# Altium PCB modFOC_ESC.PcbDoc (part 1 of 3)
Units mm, origin at the board's own origin, x right, y up, seen from the top; angles counter-clockwise.
Board outline 99.06 x 55.88 mm, 4 copper layers (Top Layer, Mid Layer 1, Mid Layer 2, Bottom Layer), stack 1.531 mm thick; 183 components, 125 nets, 799 pads, 484 vias.
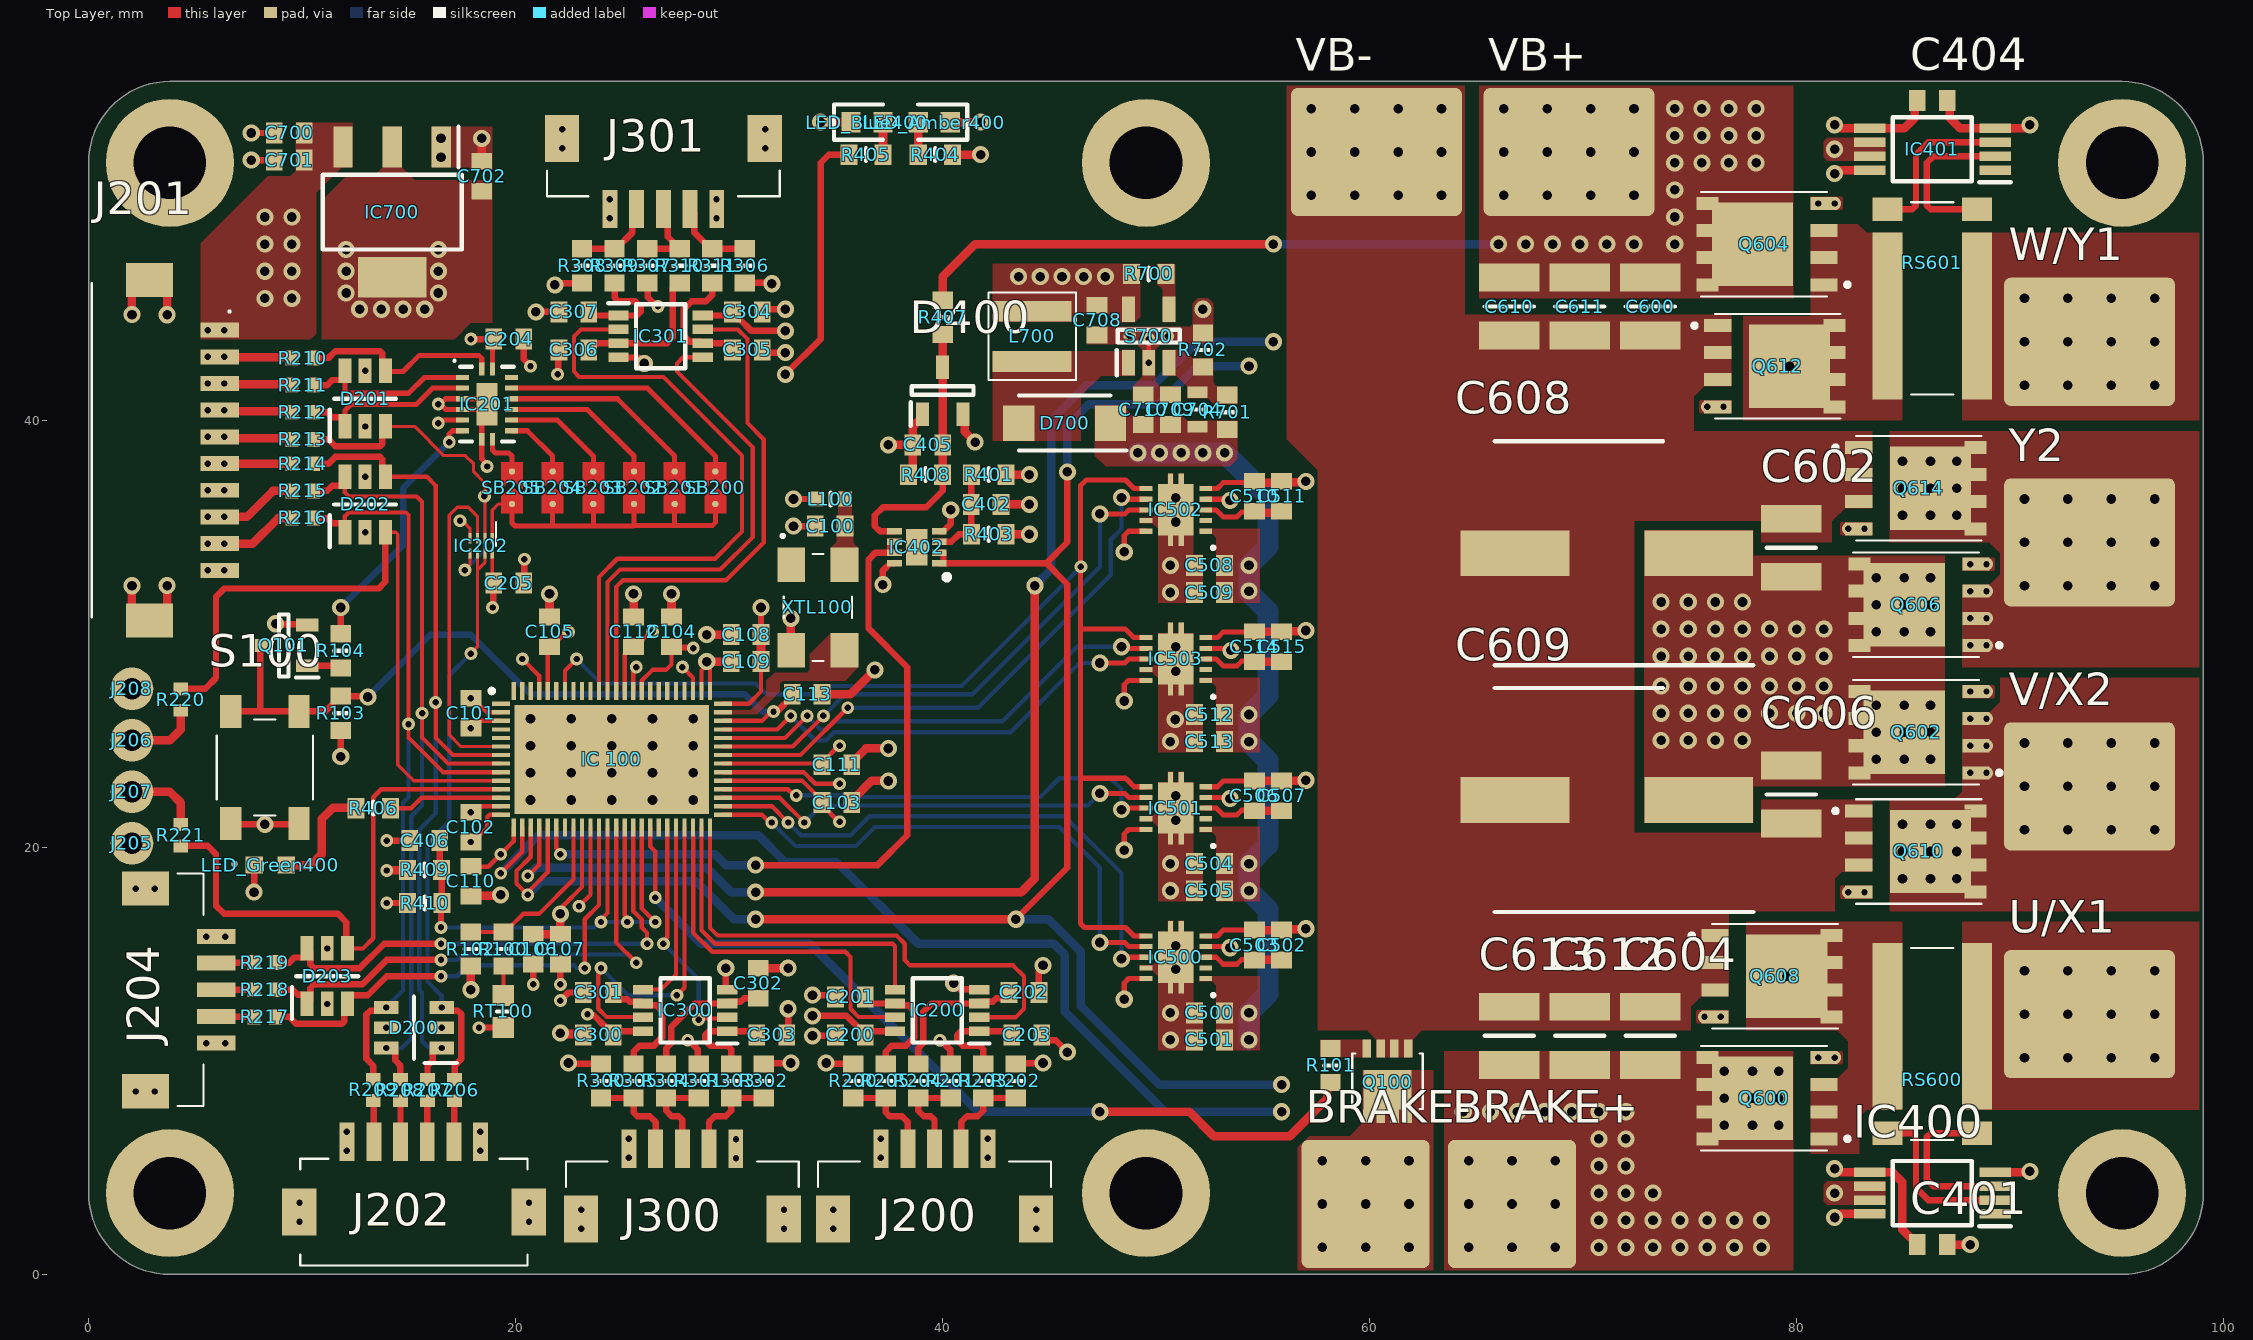
[diagram p0: Top Layer view]
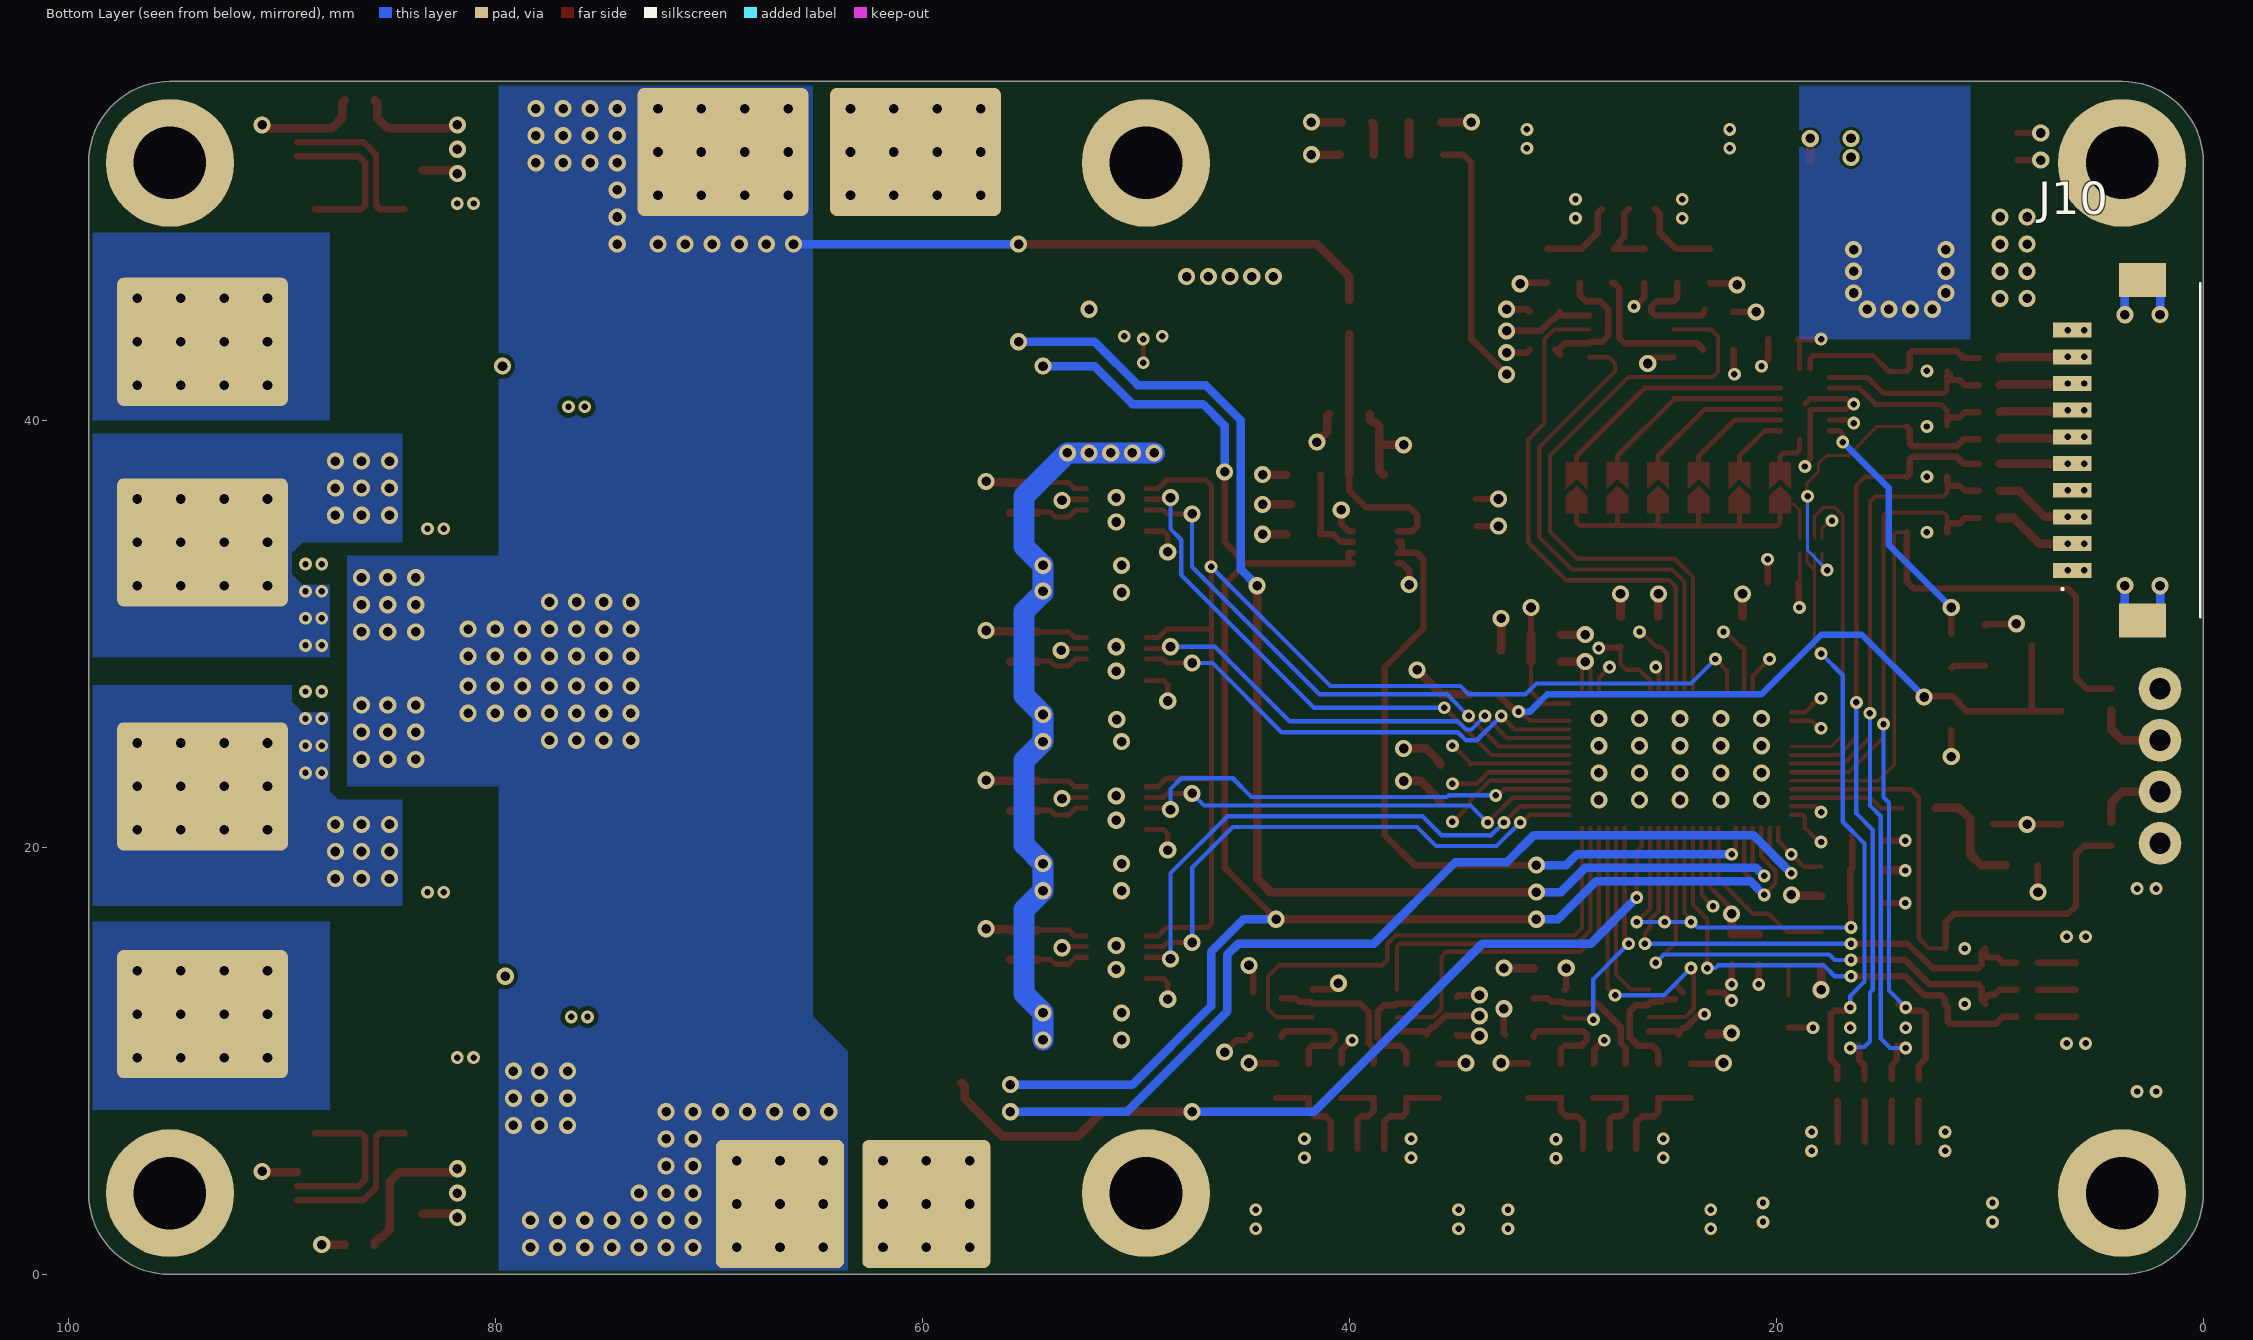
[diagram p1: Bottom Layer view, seen from below]
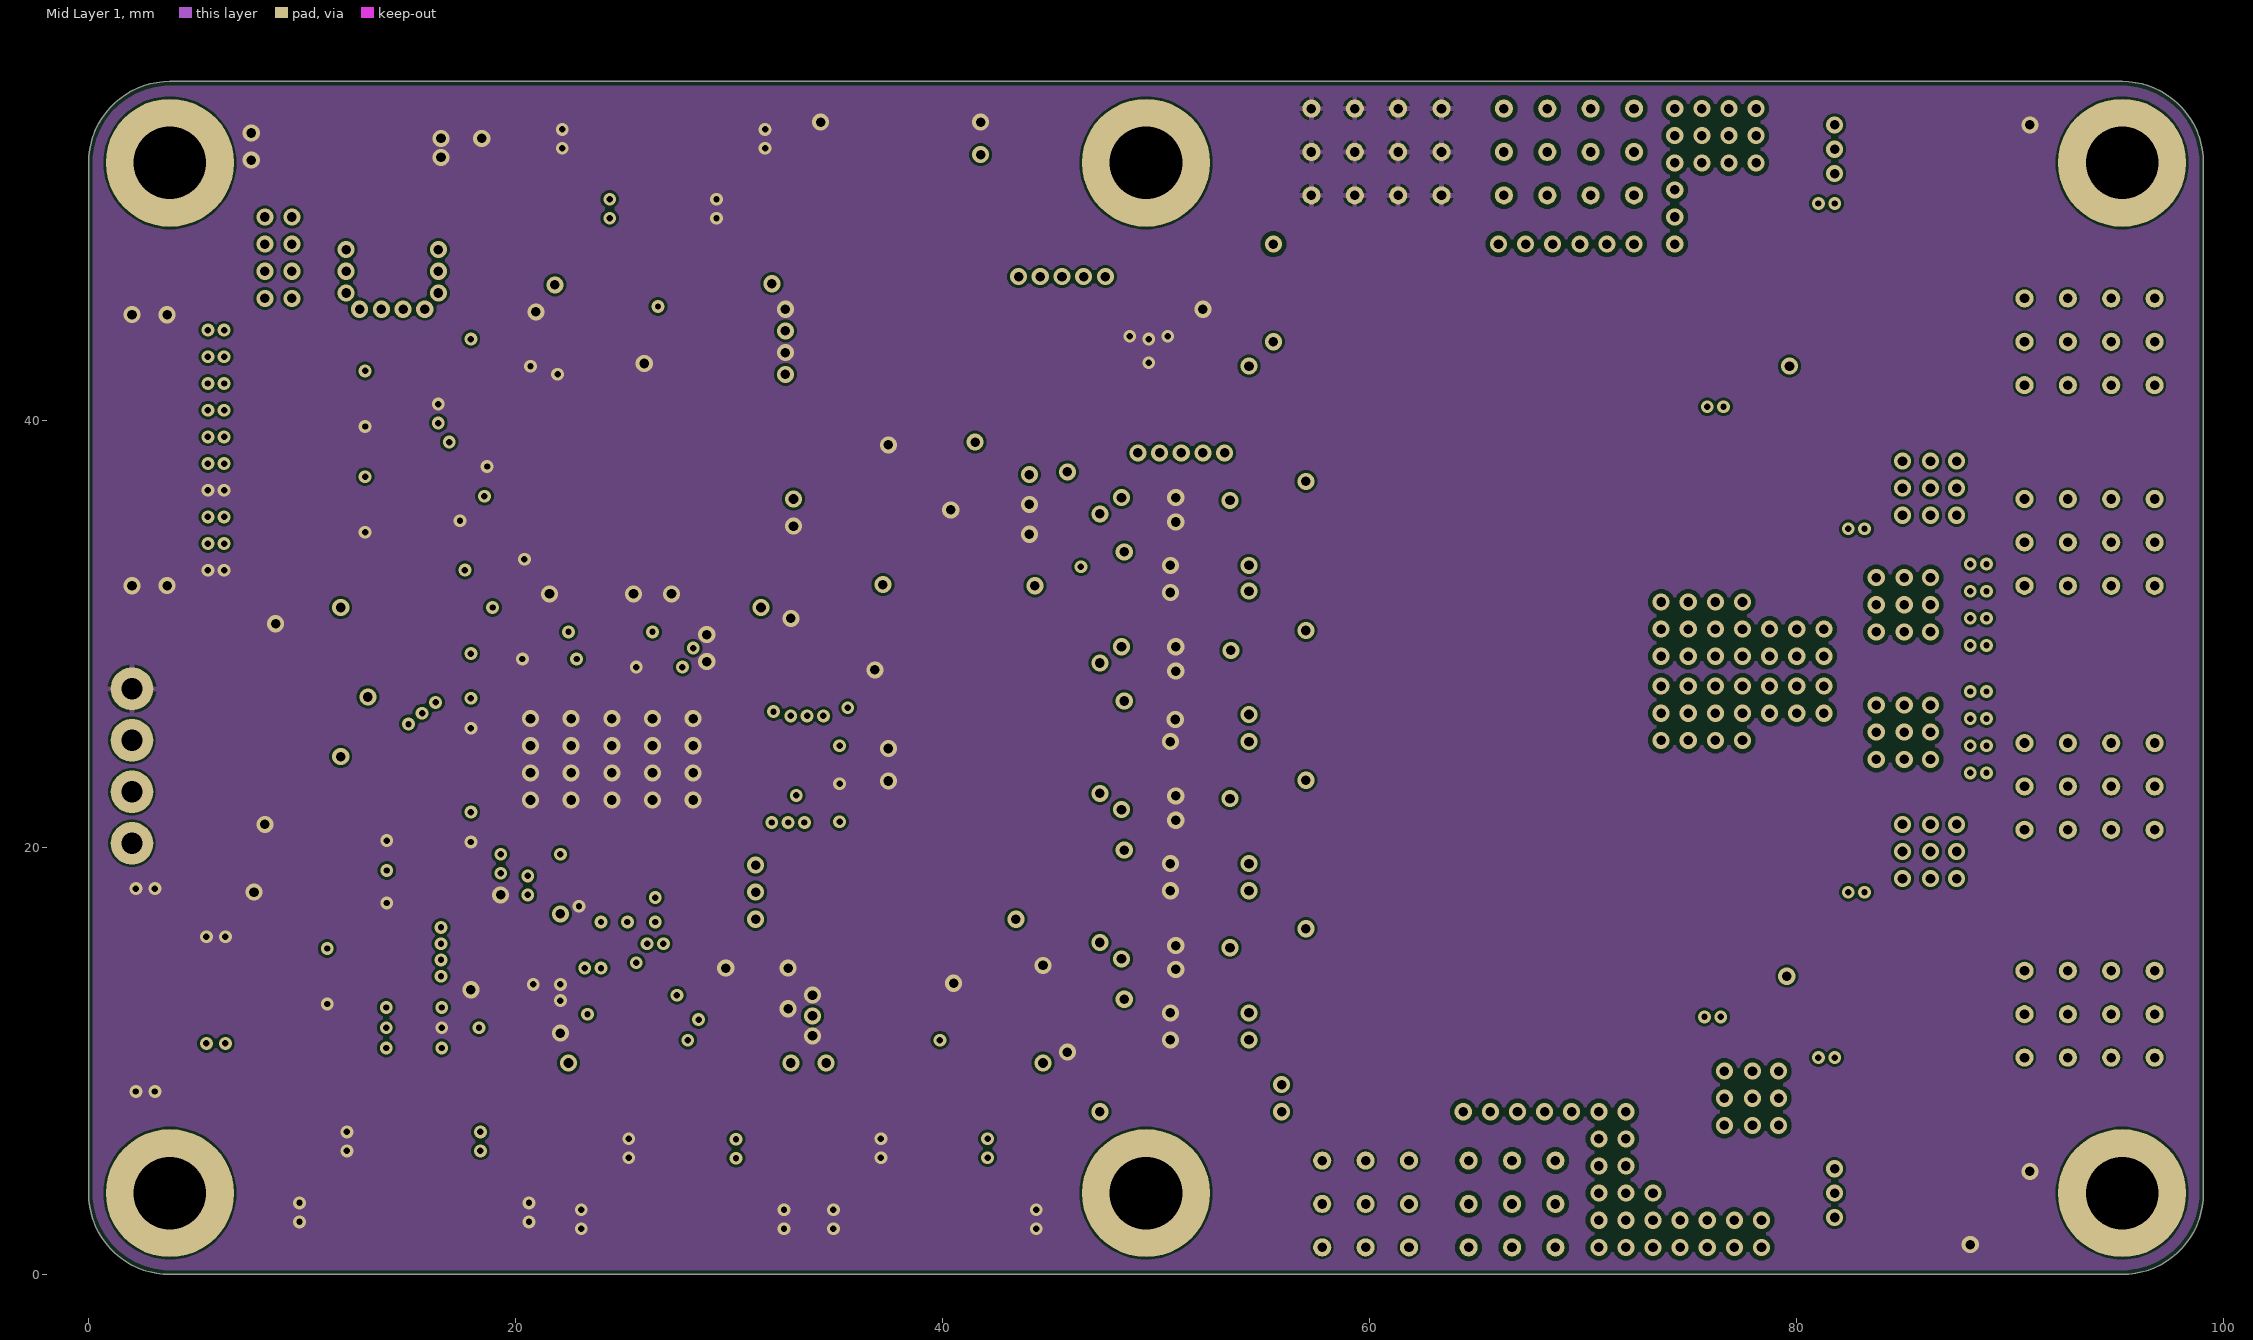
[diagram p2: Mid Layer 1]
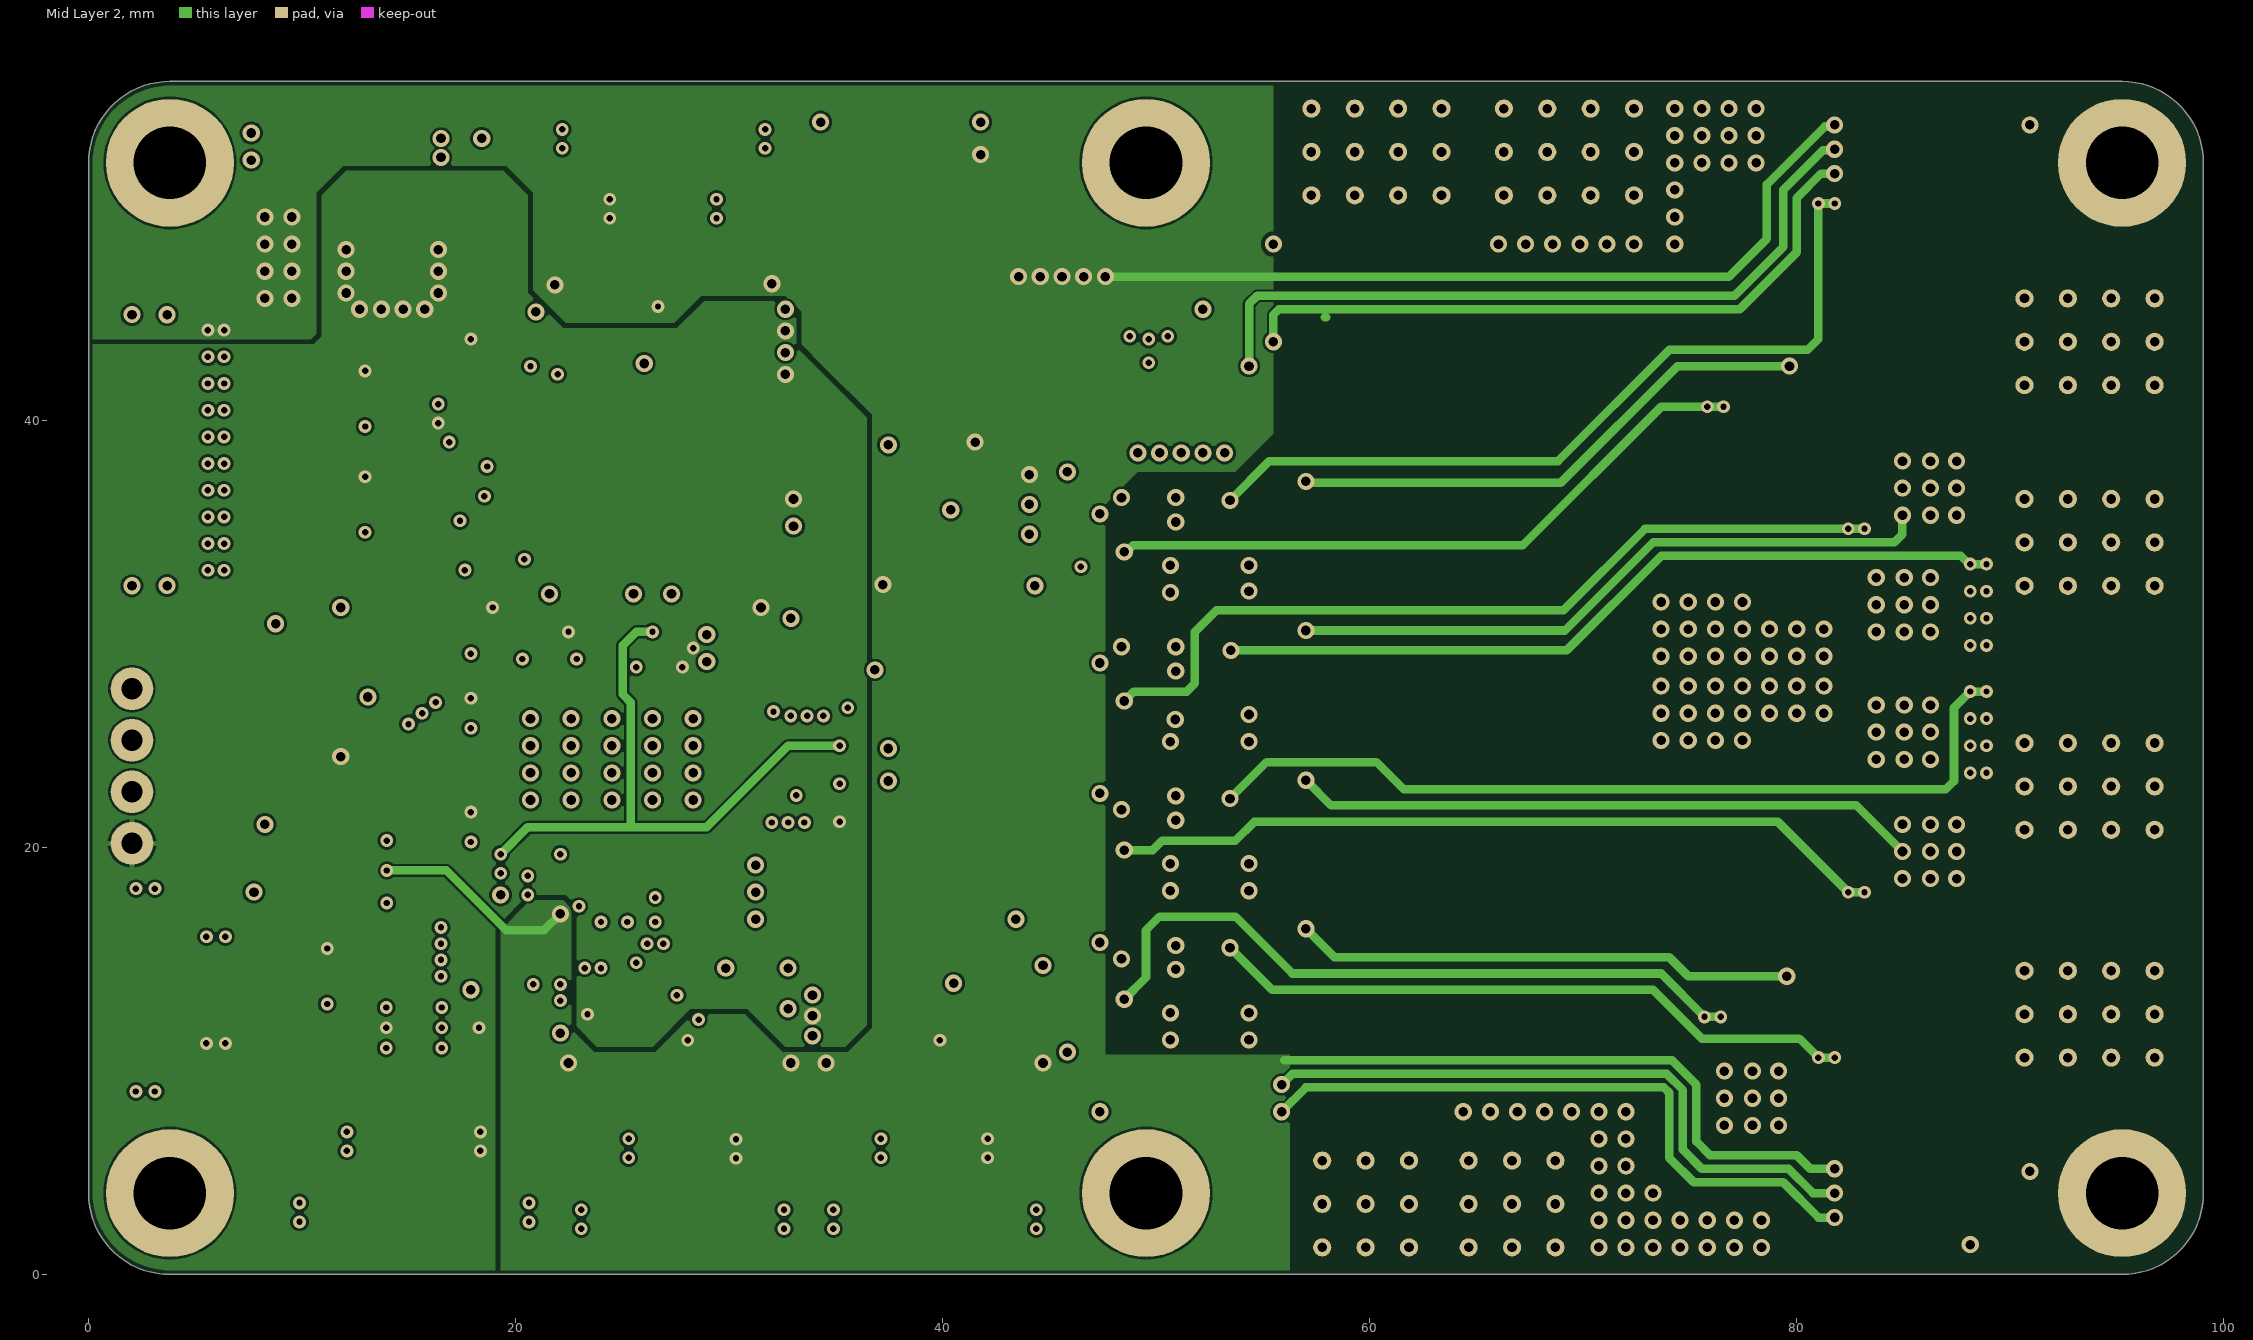
[diagram p3: Mid Layer 2]
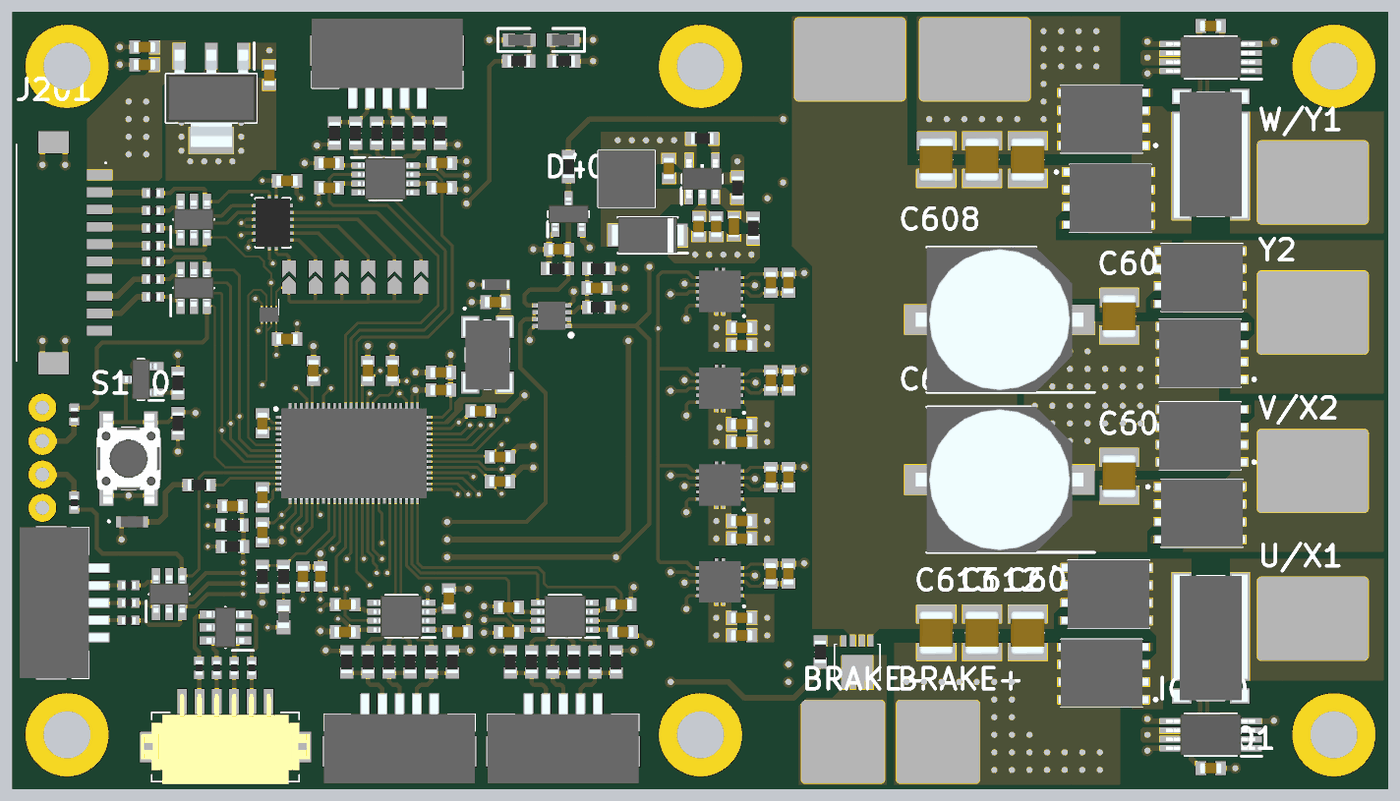
[diagram p5: 3D render of the assembled board from above, using the file's embedded part models]

## Layer stack, top to bottom
Top Solder: solder mask 0.0127, Solder Resist, Dk 3.8
Top Layer: signal copper 0.035
Dielectric 1: prepreg 0.1803, 7628, Dk 4.6
Mid Layer 1: signal copper 0.0175
Core: core 1.065, FR-4, Dk 4.5
Mid Layer 2: signal copper 0.0175
Dielectric 2: prepreg 0.1803, 7628, Dk 4.6
Bottom Layer: signal copper 0.035
Bottom Solder: solder mask 0.0127, Solder Resist, Dk 3.8

## Board outline
3.81,0 cw(c3.81,3.81) 0,3.81 0,52.07 cw(c3.81,52.07) 3.81,55.88 95.25,55.88 cw(c95.25,52.07) 99.06,52.07 99.06,3.81 cw(c95.25,3.81) 95.25,0

## Design rules (kind name [scope] priority, off if disabled: settings)
BoardOutlineClearance [All] p1: gap=0.2 ignorepadtopadclearanceinfootprint=FALSE
Clearance Clearance_VB [(InNet('VB+') oR InNet('SHA') oR InNet('SHB') oR InNet('SHC'))] p1: gap=0.2 ignorepadtopadclearanceinfootprint=FALSE except(0.102: Arc-Arc Arc-Track Arc-SMDPad Arc-THPad Arc-Text Track-Track Track-SMDPad Track-THPad Track-Text SMDPad-SMDPad SMDPad-THPad SMDPad-Text THPad-THPad THPad-Text Text-Text; 0.127: Arc-Via Track-Via SMDPad-Via THPad-Via Via-Via Via-Text; 0.25: Arc-Hole Track-Hole SMDPad-Hole THPad-Hole Via-Hole Text-Hole)
Clearance [All] p2: gap=0.102 ignorepadtopadclearanceinfootprint=FALSE except(0.127: Arc-Via Track-Via SMDPad-Via THPad-Via Via-Via Via-Fill Via-Poly Via-Region Via-Text; 0.25: Arc-Hole Track-Hole SMDPad-Hole THPad-Hole Via-Hole Fill-Hole Poly-Hole Region-Hole Text-Hole)
ComponentClearance [All] p1: gap=0.102 collisioncheckmode=3 verticalgap=0.102 showdistances=TRUE
DiffPairsRouting [All] p1: maxlimit=0.102 minlimit=0.102 mostfreqgap=0.102 toplayer_minwidth=0.102 toplayer_maxwidth=1816.048 toplayer_prefwidth=0.102 midlayer1_minwidth=0.102 midlayer1_maxwidth=1816.048 midlayer1_prefwidth=0.102 midlayer2_minwidth=0.102 midlayer2_maxwidth=1816.048 midlayer2_prefwidth=0.102 bottomlayer_minwidth=0.102 bottomlayer_maxwidth=1816.048 bottomlayer_prefwidth=0.102 maxuncoupledlength=12.7
Height [All] p1: minheight=0 maxheight=1816.048 prefheight=12.7
HoleSize [All] p1: absolutevalues=TRUE maxlimit=6.3 minlimit=0.2 maxpercent=80.000 minpercent=20.000
HoleToHoleClearance [All] p1: gap=0.25 allowstackedmicrovias=FALSE
MinimumAnnularRing [All] p1: minimumring=0.076
MinimumSolderMaskSliver [All] p1: minsoldermaskwidth=0.098
PlaneClearance [All] p1: clearance=0.102
PlaneConnect PlaneConnectPowerPads [InPadClass('PowerPads')] p1: planeconnectstyle=Direct reliefexpansion=0.508 reliefentries=4 reliefconductorwidth=0.254 reliefairgap=0.254
PlaneConnect [All] p2: pad.planeconnectstyle=Relief pad.reliefexpansion=0.3 pad.reliefentries=4 pad.reliefconductorwidth=0.102 pad.reliefairgap=0.102 via.planeconnectstyle=Direct via.reliefexpansion=0.3 via.reliefentries=4 via.reliefconductorwidth=0.127 via.reliefairgap=0.127
PolygonConnect PolygonConnectPowerPads [All vs (InPadClass('PowerPads'))] p1: connectstyle=Direct reliefconductorwidth=0.254 reliefentries=4 polygonreliefangle="90 Angle" airgapwidth=0.254
PolygonConnect [All] p2: thpad.connectstyle=Relief thpad.reliefconductorwidth=0.254 thpad.reliefentries=4 thpad.polygonreliefangle="90 Angle" thpad.airgapwidth=0.127 smdpad.connectstyle=Relief smdpad.reliefconductorwidth=0.254 smdpad.reliefentries=4 smdpad.polygonreliefangle="90 Angle" smdpad.airgapwidth=0.127 via.connectstyle=Direct via.reliefconductorwidth=0.127 via.reliefentries=4 via.polygonreliefangle="90 Angle" via.airgapwidth=0.127
RoutingVias [All] p1: holewidth=0.2 width=0.45 viastyle="Through Hole" minholewidth=0.2 minwidth=0.45 maxholewidth=6.3 maxwidth=6.55
SilkToSilkClearance [All] p1: silktosilkclearance=0
SilkToSolderMaskClearance [IsPad] p1: minsilkscreentomaskgap=0.102 clearancetoexposedcopper=TRUE
SolderMaskExpansion "SolderMaskExpansion Vias" [IsVia] p1: expansion=0.102 istentingtop=TRUE
SolderMaskExpansion [All] p2: expansion=0.05 istentingtop=FALSE
Width [All] p1: maxlimit=50 minlimit=0.102 preferedwidth=0.2 midlayer1_minwidth=0.127 midlayer2_minwidth=0.127 minimp=50.000000 maximp=50.000000 favimp=50.000000
20 further rules are at their usual default settings.

## Classes and differential pairs
component class Supply: C700 C701 C702 C704 C708 C709 C710 D700 IC700 L700 R700 R701 R702 S700
component class Sensing: C401 C402 C404 C405 C406 D400 IC400 IC401 IC402 LED_Amber400 LED_Blue400 LED_Green400 R401 R403 R404 R405 R406 R407 R408 R409 R410
component class Motion_Controller: BRAKE+ BRAKE- C100 C101 C102 C103 C104 C105 C106 C107 C108 C109 C110 C111 C112 C113 "IC 100" L100 Q100 Q101 R100 R101 R102 R103 R104 RT100 S100 XTL100
component class Inputs: C200 C201 C202 C203 C204 C205 D200 D201 D202 D203 IC200 IC201 IC202 J10 J200 J201 J202 J204 J205 J206 J207 J208 R200 R201 R202 R203 R204 R205 R206 R207 R208 R209 R210 R211 R212 R213 R214 R215 R216 R217 R218 R219 R220 R221 SB200 SB201 SB202 SB203 SB204 SB205
component class H_Bridges: C600 C602 C604 C606 C608 C609 C610 C611 C612 C613 Q600 Q602 Q604 Q606 Q608 Q610 Q612 Q614 RS600 RS601 U/X1 V/X2 VB+ VB- W/Y1 Y2
component class GateDrivers: C500 C501 C502 C503 C504 C505 C506 C507 C508 C509 C510 C511 C512 C513 C514 C515 IC500 IC501 IC502 IC503
component class ABNenc: C300 C301 C302 C303 C304 C305 C306 C307 IC300 IC301 J300 J301 R300 R301 R302 R303 R304 R305 R306 R307 R308 R309 R310 R311

## Components (designator, comment, footprint, x,y, rotation, side; value= is the part's Value field where it differs from the comment)
BRAKE+ "PW_PAD_SMOL" PW_PAD_SMOL 66.675,3.302 r90 top
BRAKE- "PW_PAD_SMOL" PW_PAD_SMOL 59.817,3.302 r180 top
C100 "100nF/16V" CAPC1608X97N 34.733,35.052 r0 top
C101 "100nF/16V" CAPC1608X97N 17.907,26.289 r90 top
C102 "100nF/16V" CAPC1608X97N 17.907,20.955 r90 top
C103 "100nF/16V" CAPC1608X97N 35.052,22.098 r180 top
C104 "100nF/16V" CAPC1608X97N 27.305,30.099 r270 top
C105 "100nF/16V" CAPC1608X97N 21.59,30.099 r270 top
C106 "4u7/16V" CAPC1608X97N 20.828,15.24 r90 top
C107 "100nF/16V" CAPC1608X97N 22.098,15.24 r270 top
C108 "4u7/16V" CAPC1608X97N 30.796,29.972 r0 top
C109 "470nF/16V" CAPC1608X97N 30.796,28.702 r180 top
C110 "100nF/16V" CAPC1608X97N 17.907,18.415 r270 top
C111 "100nF/16V" CAPC1608X97N 35.052,23.876 r0 top
C112 "100nF/16V" CAPC1608X97N 25.527,30.099 r90 top
C113 "100nF/16V" CAPC1608X97N 33.655,27.178 r180 top
C200 "100nF/16V" CAPC1608X97N 35.687,11.226 r0 top
C201 "1nF/16V" CAPC1608X97N 35.687,13.004 r180 top
C202 "1nF/16V" CAPC1608X97N 43.815,13.208 r0 top
C203 "1nF/16V" CAPC1608X97N 43.942,11.226 r0 top
C204 "100nF/16V" CAPC1608X97N 19.685,43.815 r0 top
C205 "100nF/16V" CAPC1608X97N 19.685,32.385 r0 top
C300 "100nF/16V" CAPC1608X97N 23.876,11.226 r0 top
C301 "100pF/10V" CAPC1608X97N 23.876,13.208 r180 top
C302 "100pF/10V" CAPC1608X97N 31.369,13.639 r90 top
C303 "100pF/10V" CAPC1608X97N 32.004,11.226 r0 top
C304 "100nF/16V" CAPC1608X97N 30.861,45.085 r180 top
C305 "100pF/10V" CAPC1608X97N 30.861,43.307 r0 top
C306 "100pF/10V" CAPC1608X97N 22.733,43.307 r180 top
C307 "100pF/10V" CAPC1608X97N 22.733,45.085 r180 top
C401 "100nF/16V" CAPC1608X97N 86.36,1.397 r180 top
C402 "100nF/16V" CAPC1608X97N 42.037,36.068 r180 top
C404 "100nF/16V" CAPC1608X97N 86.36,54.991 r180 top
C405 "100nF/16V" CAPC1608X97N 39.305,38.862 r0 top
C406 "100nF/16V" CAPC1608X97N 15.748,20.32 r0 top
C500 "1nF/16V" CAPC1608X97N 52.504,12.257 r0 top
C501 "4u7/16V" CAPC1608X97N 52.504,10.987 r0 top
C502 "1nF/16V" CAPC1608X97N 55.877,15.432 r270 top
C503 "470nF/16V" CAPC1608X97N 54.607,15.432 r270 top
C504 "1nF/16V" CAPC1608X97N 52.504,19.242 r0 top
C505 "4u7/16V" CAPC1608X97N 52.504,17.972 r0 top
C506 "1nF/16V" CAPC1608X97N 54.607,22.417 r270 top
C507 "470nF/16V" CAPC1608X97N 55.877,22.417 r270 top
C508 "1nF/16V" CAPC1608X97N 52.504,33.212 r0 top
C509 "4u7/16V" CAPC1608X97N 52.504,31.942 r0 top
C510 "1nF/16V" CAPC1608X97N 54.61,36.449 r270 top
C511 "470nF/16V" CAPC1608X97N 55.88,36.449 r270 top
C512 "1nF/16V" CAPC1608X97N 52.504,26.227 r0 top
C513 "4u7/16V" CAPC1608X97N 52.504,24.957 r0 top
C514 "1nF/16V" CAPC1608X97N 54.607,29.402 r270 top
C515 "470nF/16V" CAPC1608X97N 55.877,29.402 r270 top
C600 "2u2/100V" CAPC3225X280N 73.152,45.339 r90 top
C602 "2u2/100V" CAPC3225X280N 79.756,34.036 r270 top
C604 "2u2/100V" CAPC3225X280N 73.152,11.176 r270 top
C606 "2u2/100V" CAPC3225X280N 79.756,22.479 r90 top
C608 "47uF 80V" CAPAE1050X1050N 71.12,33.782 r180 top
C609 "47uF 80V" CAPAE1050X1050N 71.12,22.225 r180 top
C610 "2u2/100V" CAPC3225X280N 66.548,45.339 r90 top
C611 "2u2/100V" CAPC3225X280N 69.85,45.339 r90 top
C612 "2u2/100V" CAPC3225X280N 69.85,11.176 r270 top
C613 "2u2/100V" CAPC3225X280N 66.548,11.176 r270 top
C700 "4u7/16V" CAPC1608X97N 9.398,53.467 r180 top
C701 "4u7/16V" CAPC1608X97N 9.398,52.197 r180 top
C702 "4u7/16V" CAPC1608X97N 18.415,51.435 r90 top
C704 "200p/50V/NP0" CAPC1608X90N 51.943,40.513 r90 top
C708 "4u7/16V" CAPC1608X97N 47.244,44.704 r270 top
C709 "4u7/16V" CAPC1608X97N 50.673,40.513 r90 top
C710 "4u7/16V" CAPC1608X97N 49.403,40.513 r90 top
D200 "ESDSUPPRESSOR" SOT23-6 15.24,11.557 r180 top
D201 "ESDSUPPRESSOR" SOT23-6 12.954,41.021 r90 top
D202 "ESDSUPPRESSOR" SOT23-6 12.954,36.068 r90 top
D203 "ESDSUPPRESSOR" SOT23-6 11.176,13.97 r90 top
D400 "30V/200mA" SOT95P240X110-3N 40.005,41.402 r90 top
D700 "1A/30V" SODFL5226X110N 45.72,39.878 r180 top
IC200 "S-Trigger" SOP65P400X110-8N 39.751,12.369 r180 top
IC201 "SN74HCS238BQB-Q1" SN74HCS238BQB-Q1 18.665,40.768 r0 top
IC202 "dual NAND" 74AUP1G74GF115 18.388,34.136 r180 top
IC300 "S-Trigger" SOP65P400X110-8N 27.94,12.369 r180 top
IC301 "S-Trigger" SOP65P400X110-8N 26.797,43.942 r0 top
IC400 "INA240A2PWR" SOP65P640X120-8N 86.36,3.81 r180 top
IC401 "INA240A2PWR" SOP65P640X120-8N 86.36,52.705 r180 top
IC402 "LM358QT" SON50P200X200X60-9N-D 38.797,34.063 r180 top
IC500 "UCC27282QDRCTQ1" UCC27282DRCR 50.927,14.859 r180 top
IC501 "UCC27282QDRCTQ1" UCC27282DRCR 50.927,21.844 r180 top
IC502 "UCC27282QDRCTQ1" UCC27282DRCR 50.927,35.814 r180 top
IC503 "UCC27282QDRCTQ1" UCC27282DRCR 50.927,28.829 r180 top
IC700 "1A 3,3V LDO" SOT230P700X180-4N 14.224,49.761 r270 top
"IC 100" "Motion Ctrl" QFN40P1050X650X90-77N 24.511,24.13 r0 top
J10 "DF13A-10P-1.25H_21_" DF13A10P125H21 3.15,38.608 r270 bottom
J200 "5_PIN" DF13A5P125H21 39.624,3.098 r180 top
J201 "DF13A-10P-1.25H_21_" DF13A10P125H21 3.15,38.608 r90 top
J202 "6_PIN" DF13A6P125H21 15.24,2.921 r180 top
J204 "5_PIN" DF13A5P125H21 3.175,13.335 r90 top
J205 "3V3" PIN 2.032,20.193 r90 top
J206 "UART_RX" PIN 2.032,25.019 r90 top
J207 "UART_TX" PIN 2.032,22.606 r90 top
J208 "GND" PIN 2.032,27.432 r90 top
J300 "5_PIN" DF13A5P125H21 27.813,3.098 r180 top
J301 "5_PIN" DF13A5P125H21 26.924,52.705 r0 top
L100 "30R@100MHz/5A" BLM18KG101TH1D 34.758,36.322 r0 top
L700 "10uH/4,6A" 74438357100 44.196,43.942 r270 top
LED_Amber400 "AMBER/2V/20mA" LEDC1608X55N 39.612,53.975 r180 top
LED_Blue400 "BLUE/2,85V/5mA" LEDC1608X40N 36.461,53.975 r0 top
LED_Green400 "GREEN/2,4V/20mA" LGQ396PS35 8.509,19.177 r0 top
Q100 "BUK9M35-80EX" BUK7M1260E 60.842,9.479 r180 top
Q101 "BC847A,235" SOT95P230X110-3N 9.144,29.464 r180 top
Q600 "80V/100A" SI7141DPT1GE3 78.486,8.255 r180 top
Q602 "80V/100A" SI7141DPT1GE3 85.598,25.4 r180 top
Q604 "80V/100A" SI7141DPT1GE3 78.486,48.26 r180 top
Q606 "80V/100A" SI7141DPT1GE3 85.598,31.369 r180 top
Q608 "80V/100A" SI7141DPT1GE3 78.994,13.97 r0 top
Q610 "80V/100A" SI7141DPT1GE3 85.725,19.812 r0 top
Q612 "80V/100A" SI7141DPT1GE3 79.121,42.545 r0 top
Q614 "80V/100A" SI7141DPT1GE3 85.725,36.83 r0 top
R100 "4k7" RESC1608X55N 19.431,15.24 r270 top
R101 "10R" RESC1608X55N 58.175,9.788 r90 top
R102 "4k7" RESC1608X55N 17.907,15.24 r90 top
R103 "4k7" RESC1608X55N 11.811,26.289 r270 top
R104 "1k" RESC1608X55N 11.811,29.21 r90 top
R200 "4k7" RESC1608X55N 35.814,9.067 r90 top
R201 "4k7" RESC1608X55N 40.386,9.067 r90 top
R202 "4k7" RESC1608X55N 43.434,9.067 r90 top
R203 "4k7" RESC1608X55N 41.91,9.067 r270 top
R204 "4k7" RESC1608X55N 38.862,9.067 r270 top
R205 "4k7" RESC1608X55N 37.338,9.067 r270 top
R206 "100R" RESC1005X40N 17.145,8.636 r90 top
R207 "100R" RESC1005X40N 15.875,8.636 r90 top
R208 "100R" RESC1005X40N 14.605,8.636 r90 top
R209 "100R" RESC1005X40N 13.335,8.644 r90 top
R210 "100R" RESC1005X40N 10.033,42.926 r180 top
R211 "100R" RESC1005X40N 10.033,41.656 r180 top
R212 "100R" RESC1005X40N 10.033,40.386 r180 top
R213 "100R" RESC1005X40N 10.033,39.116 r180 top
R214 "100R" RESC1005X40N 10.033,37.973 r180 top
R215 "100R" RESC1005X40N 10.033,36.703 r180 top
R216 "100R" RESC1005X40N 10.033,35.433 r180 top
R217 "100R" RESC1005X40N 8.255,12.065 r0 top
R218 "100R" RESC1005X40N 8.255,13.335 r0 top
R219 "100R" RESC1005X40N 8.255,14.605 r0 top
R220 "100R" RESC1005X40N 4.318,26.924 r90 top
R221 "100R" RESC1005X40N 4.318,20.574 r270 top
R300 "4k7" RESC1608X55N 24.003,9.067 r90 top
R301 "4k7" RESC1608X55N 28.575,9.067 r90 top
R302 "4k7" RESC1608X55N 31.623,9.067 r90 top
R303 "1k" RESC1608X55N 30.099,9.067 r270 top
R304 "1k" RESC1608X55N 27.051,9.067 r270 top
R305 "1k" RESC1608X55N 25.527,9.067 r270 top
R306 "4k7" RESC1608X55N 30.734,47.244 r270 top
R307 "4k7" RESC1608X55N 26.162,47.244 r270 top
R308 "4k7" RESC1608X55N 23.114,47.244 r270 top
R309 "1k" RESC1608X55N 24.638,47.244 r90 top
R310 "1k" RESC1608X55N 27.686,47.244 r90 top
R311 "1k" RESC1608X55N 29.21,47.244 r90 top
R401 "4k7" RESC1608X55N 42.164,37.465 r0 top
R403 "4k7" RESC1608X55N 42.164,34.671 r180 top
R404 "1k5" RESC1608X55N 39.662,52.451 r180 top
R405 "470R" RESC1608X55N 36.411,52.451 r0 top
R406 "470R" RESC1608X55N 13.335,21.844 r180 top
R407 "47k" RESC1608X55N 40.005,44.831 r270 top
R408 "2k7" RESC1608X55N 39.205,37.465 r180 top
R409 "4k7" RESC1608X55N 15.739,18.947 r180 top
R410 "4k7" RESC1608X55N 15.748,17.399 r0 top
R700 "1M" RESC1608X55N 49.657,46.863 r180 top
R701 "133k" RESC1608X55N 53.34,40.386 r90 top
R702 "13k3" RESC1608X55N 52.197,43.307 r90 top
RS600 "5mR/4W" FC4L90R025FER 86.36,10.795 r180 top
RS601 "5mR/4W" FC4L90R025FER 86.36,45.72 r0 top
RT100 "10k NTC" THRMC1608X95N 19.431,12.319 r90 top
S100 "NO-SW" PTS647SM50SMTR2LFS 8.255,23.749 r90 top
S700 "LMR62014XMF_NOPB" SOT95P280X145-5N 49.657,43.954 r90 top
SB200 "Solder Bridge" SOLDER-BRIDGE_R0603-0R 29.358,36.851 r90 top
SB201 "Solder Bridge" SOLDER-BRIDGE_R0603-0R 27.453,36.851 r90 top
SB202 "Solder Bridge" SOLDER-BRIDGE_R0603-0R 25.548,36.851 r90 top
SB203 "Solder Bridge" SOLDER-BRIDGE_R0603-0R 23.643,36.851 r90 top
SB204 "Solder Bridge" SOLDER-BRIDGE_R0603-0R 21.738,36.851 r90 top
SB205 "Solder Bridge" SOLDER-BRIDGE_R0603-0R 19.833,36.851 r90 top
U/X1 "PowerPad" POWER_PAD 93.726,12.192 r0 top
V/X2 "PowerPad" POWER_PAD 93.726,22.86 r0 top
VB+ "PowerPad" POWER_PAD 69.342,52.578 r0 top
VB- "PowerPad" POWER_PAD 60.325,52.578 r0 top
W/Y1 "PowerPad" POWER_PAD 93.726,43.688 r0 top
XTL100 "25MHz" FOX924B25 34.163,31.242 r270 top
Y2 "PowerPad" POWER_PAD 93.726,34.29 r0 top

## Footprints (in the part's own frame and the unit in brackets; to place one, negate y for a bottom-side part, rotate by r counter-clockwise, add the part's x,y. Pads: shape width x height; smd on the part's side, far side on the other; paste and mask are expansions set on the pad)
74AUP1G74GF115 [mm]
  rect 0.15x0.5 smd: 1(-0.525,-0.35) 2(-0.175,-0.35) 3(0.175,-0.35) 4(0.525,-0.35) 5(0.525,0.35) 6(0.175,0.35) 7(-0.175,0.35) 8(-0.525,0.35)
  silkscreen extent -0.7,-1.1 -0.7,0, body extent -0.7,-0.5 0.7,0.5, height 0.6
74438357100 [mm]
  rect 0.97x3.7 smd: 1(-1.18,0) 2(1.18,0)
  silkscreen extent -2.05,-2.05 2.05,2.05, body extent -2.05,-2.05 2.05,2.05, height 4.1
BLM18KG101TH1D [mm]
  rect 0.65x0.7 smd: 1(-0.675,0) 2(0.675,0)
  silkscreen extent 0,-0.3 0,0.3, body extent -0.93,-0.4 0.93,0.4, height 0.85
BUK7M1260E [mm]
  rect 0.4x0.83 smd: 1(-0.975,-1.106) 2(-0.325,-1.106) 3(0.325,-1.106) 4(0.975,-1.106)
  rect 2.25x1.85 smd: 5(0,0.834)
  rect 0.4x0.62 smd: 6(0.95,2.069) 7(0.312,2.069) 8(-0.345,2.069) 9(-0.95,2.069)
  silkscreen extent -1.65,-0.87 1.65,1.73
CAPAE1050X1050N [mm]
  rect 5.1x2.15 smd: 1(-4.3,0) 2(4.3,0)
  silkscreen extent -6.85,-5.25 5.25,5.25, body extent -6.05,-5.25 6.05,5.25, height 10.5
CAPC1608X90N [mm]
  rect 0.54x0.94 smd: 1(-0.8,0) 2(0.8,0)
  silkscreen extent 0,-0.3 0,0.3, body extent -0.8,-0.4 0.8,0.4, height 0.9
CAPC1608X97N [mm]
  rect 0.78x0.98 smd: 1(-0.7,0) 2(0.7,0)
  body extent -0.8,-0.4 0.8,0.4, height 0.97
CAPC3225X280N [mm]
  rect 1.3x2.82 smd: 1(-1.36,0) 2(1.36,0)
  silkscreen extent 0,-1.15 0,1.15, body extent -1.6,-1.25 1.6,1.25, height 2.8
DF13A5P125H21 [mm]
  rect 0.7x1.8 smd: 1(2.5,-2.8) 2(1.25,-2.8) 3(0,-2.8) 4(-1.25,-2.8) 5(-2.5,-2.8)
  rect 1.6x2.2 smd: MP1(-4.75,0.5) MP2(4.75,0.5)
  silkscreen extent -5.45,-2.2 5.45,-1, body extent -5.45,-3.63 5.45,2.8, height 3.85
DF13A6P125H21 [mm]
  rect 0.7x1.8 smd: 1(-3.125,-3.3) 2(-1.875,-3.3) 3(-0.625,-3.3) 4(0.625,-3.3) 5(1.875,-3.3) 6(3.125,-3.3)
  rect 1.6x2.2 smd: MP1(-5.375,0) MP2(5.375,0)
  silkscreen extent -5.33,-2.5 5.33,2.5, body extent -6.07,-3.83 6.07,2.67, height 3.68
DF13A10P125H21 [mm]
  rect 0.7x1.8 smd: 1(5.625,-3) 2(4.375,-3) 3(3.125,-3) 4(1.875,-3) 5(0.625,-3) 6(-0.625,-3) 7(-1.875,-3) 8(-3.125,-3) 9(-4.375,-3) 10(-5.625,-3)
  rect 1.6x2.2 smd: MP1(-7.975,0.3) MP2(7.975,0.3)
  silkscreen extent -7.83,-3.5 7.83,3
FC4L90R025FER [mm]
  rect 1.4x1.1 smd: 1(-2.1,4.175) 4(2.1,4.175)
  rect 1.4x7.8 smd: 2(-2.1,-0.825) 3(2.1,-0.825)
  silkscreen extent -1,-4.5 1,4.5, body extent -2.69,-4.58 2.69,4.61, height 0.9
FOX924B25 [mm]
  rect 1.6x1.3 smd: 1(-2,-1.25) 2(2,-1.25) 3(2,1.25) 4(-2,1.25)
  silkscreen extent -3.4,-1.7 2.5,1.6, body extent -2.67,-1.77 2.67,1.77, height 1.6
LEDC1608X40N [mm]
  rect 0.9x0.95 smd: 1(-0.75,0) 2(0.75,0)
  silkscreen extent -1.55,-0.82 0.75,0.82, body extent -0.8,-0.4 0.8,0.4, height 0.5
LEDC1608X55N [mm]
  rect 0.9x0.95 smd: 1(-0.75,0) 2(0.75,0)
  silkscreen extent -1.55,-0.82 0.75,0.82, body extent -0.8,-0.4 0.8,0.4, height 0.5
LGQ396PS35 [mm]
  rect 0.8x0.8 smd: 1(-0.75,0) 2(0.75,0)
  silkscreen extent -1.72,0 -1.62,0.1, body extent -0.8,-0.4 0.8,0.4, height 0.5
PIN [mm]
  round 2 hole 1: 1(0,0)
POWER_PAD [mm]
  round 0.85 hole 0.45: 1(-3.048,-2.032) 1(-3.048,0) 1(-3.048,2.032) 1(-1.016,-2.032) 1(-1.016,0) 1(-1.016,2.032) 1(1.016,-2.032) 1(1.016,0) 1(1.016,2.032) 1(3.048,-2.032) 1(3.048,0) 1(3.048,2.032)
  rrect10% 8x6 smd far side: 1(0,0)
  rrect10% 8x6 smd: 1(0,0)
PTS647SM50SMTR2LFS [mm]
  rect 1.55x1 smd: 1(-2.625,1.6) 2(-2.625,-1.6) 3(2.625,-1.6) 4(2.625,1.6)
  silkscreen extent -2.25,-2.25 2.25,2.25, body extent -3.25,-2.25 3.25,2.25, height 5
PW_PAD_SMOL [mm]
  round 0.85 hole 0.45: 1(-2.032,-2.032) 1(-2.032,0) 1(-2.032,2.032) 1(0,2.032) 1(0,0) 1(0,-2.032) 1(2.032,-2.032) 1(2.032,0) 1(2.032,2.032)
  rrect10% 6x6 smd far side: 1(0,0)
  rrect10% 6x6 smd: 1(0,0)
QFN40P1050X650X90-77N [mm]
  rect 0.85x0.2 smd: 1(-5.2,2.6) 2(-5.2,2.2) 3(-5.2,1.8) 4(-5.2,1.4) 5(-5.2,1) 6(-5.2,0.6) 7(-5.2,0.2) 8(-5.2,-0.2) 9(-5.2,-0.6) 10(-5.2,-1) 11(-5.2,-1.4) 12(-5.2,-1.8) 13(-5.2,-2.2) 14(-5.2,-2.6) 39(5.2,-2.6) 40(5.2,-2.2) 41(5.2,-1.8) 42(5.2,-1.4) 43(5.2,-1) 44(5.2,-0.6) 45(5.2,-0.2) 46(5.2,0.2) 47(5.2,0.6) 48(5.2,1) 49(5.2,1.4) 50(5.2,1.8) 51(5.2,2.2) 52(5.2,2.6)
  rect 0.2x0.85 smd: 15(-4.6,-3.2) 16(-4.2,-3.2) 17(-3.8,-3.2) 18(-3.4,-3.2) 19(-3,-3.2) 20(-2.6,-3.2) 21(-2.2,-3.2) 22(-1.8,-3.2) 23(-1.4,-3.2) 24(-1,-3.2) 25(-0.6,-3.2) 26(-0.2,-3.2) 27(0.2,-3.2) 28(0.6,-3.2) 29(1,-3.2) 30(1.4,-3.2) 31(1.8,-3.2) 32(2.2,-3.2) 33(2.6,-3.2) 34(3,-3.2) 35(3.4,-3.2) 36(3.8,-3.2) 37(4.2,-3.2) 38(4.6,-3.2) 53(4.6,3.2) 54(4.2,3.2) 55(3.8,3.2) 56(3.4,3.2) 57(3,3.2) 58(2.6,3.2) 59(2.2,3.2) 60(1.8,3.2) 61(1.4,3.2) 62(1,3.2) 63(0.6,3.2) 64(0.2,3.2) 65(-0.2,3.2) 66(-0.6,3.2) 67(-1,3.2) 68(-1.4,3.2) 69(-1.8,3.2) 70(-2.2,3.2) 71(-2.6,3.2) 72(-3,3.2) 73(-3.4,3.2) 74(-3.8,3.2) 75(-4.2,3.2) 76(-4.6,3.2)
  rect 9.1x5.1 smd: 77(0,0)
  silkscreen extent -5.72,3.1 -5.53,3.3, body extent -5.3,-3.3 5.3,3.3, height 0.9
RESC1005X40N [mm]
  rect 0.6x0.7 smd: 1(-0.5,0) 2(0.5,0)
  body extent -0.5,-0.25 0.5,0.25, height 0.4
RESC1608X55N [mm]
  rect 0.8x0.95 smd: 1(-0.8,0) 2(0.8,0)
  silkscreen extent 0,-0.3 0,0.3, body extent -0.8,-0.4 0.8,0.4, height 0.55
SI7141DPT1GE3 [mm]
  rect 1.27x0.61 smd: 1(-2.81,1.905) 2(-2.81,0.635) 3(-2.81,-0.635) 4(-2.81,-1.905)
  rect 0.71x0.61 smd: 5(2.81,-1.905) 6(2.81,-0.635) 7(2.81,0.635) 8(2.81,1.905)
  rect 3.81x3.91 smd: 9(0.55,0)
  rect 0.32x0.255 smd: 10(2.3,2.083) 11(2.3,-2.083)
  silkscreen extent -4,-2.45 2.95,2.45, body extent -3.38,-2.45 3.1,2.45, height 1.22
SN74HCS238BQB-Q1 [mm]
  rect 0.24x0.6 smd: 1(-0.25,1.65) 8(-0.25,-1.65) 9(0.25,-1.65) 16(0.25,1.65)
  rect 0.6x0.24 smd: 2(-1.15,1.25) 3(-1.15,0.75) 4(-1.15,0.25) 5(-1.15,-0.25) 6(-1.15,-0.75) 7(-1.15,-1.25) 10(1.15,-1.25) 11(1.15,-0.75) 12(1.15,-0.25) 13(1.15,0.25) 14(1.15,0.75) 15(1.15,1.25)
  rect 1x2 smd: 17(0,0)
  silkscreen extent -1.57,-1.75 1.25,2.08, body extent -1.25,-1.75 1.25,1.75, height 0.8
SODFL5226X110N [mm]
  rect 1.46x1.67 smd: 1(-2.15,0) 2(2.15,0)
  silkscreen extent -2.88,-1.29 2.14,1.29, body extent -2.59,-1.29 2.59,1.29, height 1.1
SOLDER-BRIDGE_R0603-0R [mm]
  round 0.3 smd: 1(-0.762,0) 2(0.762,0)
  Top Layer region: -0.068,-0.5 0.432,0 -0.068,0.5 1.2,0.5 1.2,-0.5
  Top Layer region: -1.2,0.5 -1.2,-0.5 -0.4,-0.5 0.1,0 -0.4,0.5 -1.2,0.5
SON50P200X200X60-9N-D [mm]
  rect 0.7x0.3 smd: 1(-1.05,0.75) 2(-1.05,0.25) 3(-1.05,-0.25) 4(-1.05,-0.75) 5(1.05,-0.75) 6(1.05,-0.25) 7(1.05,0.25) 8(1.05,0.75)
  rect 1x1.7 smd: 9(0,0)
  silkscreen extent -1.53,1.28 -1.28,1.52, body extent -1.05,-1 1.05,1, height 0.6
SOP65P400X110-8N [mm]
  rect 0.95x0.45 smd: 1(-1.975,0.975) 2(-1.975,0.325) 3(-1.975,-0.325) 4(-1.975,-0.975) 5(1.975,-0.975) 6(1.975,-0.325) 7(1.975,0.325) 8(1.975,0.975)
  silkscreen extent -2.45,-1.5 1.15,1.55, body extent -2,-1.5 2,1.5, height 1.1
SOP65P640X120-8N [mm]
  rect 1.475x0.45 smd: 1(-2.938,0.975) 2(-2.938,0.325) 3(-2.938,-0.325) 4(-2.938,-0.975) 5(2.938,-0.975) 6(2.938,-0.325) 7(2.938,0.325) 8(2.938,0.975)
  silkscreen extent -3.67,-1.5 1.85,1.55, body extent -3.21,-1.5 3.21,1.5, height 1.08
SOT23-6 [mm]
  rect 1.15x0.6 smd: 1(-1.3,0.95) 2(-1.3,0) 3(-1.3,-0.95) 4(1.3,-0.95) 5(1.3,0) 6(1.3,0.95)
  silkscreen extent -2.01,-1.45 0,1.65, body extent -1.35,-1.45 1.35,1.45, height 1.45
SOT95P230X110-3N [mm]
  rect 1.05x0.6 smd: 1(-1.1,0.95) 2(-1.1,-0.95) 3(1.1,0)
  silkscreen extent -1.63,-1.45 0.23,1.5, body extent -1.15,-1.45 1.15,1.45, height 1.1
SOT95P240X110-3N [mm]
  rect 1.1x0.6 smd: 1(-1.1,0.95) 2(-1.1,-0.95) 3(1.1,0)
  silkscreen extent -1.65,-1.45 0.2,1.5, body extent -1.2,-1.45 1.2,1.45, height 1.1
SOT95P280X145-5N [mm]
  rect 1.2x0.6 smd: 1(-1.25,0.95) 2(-1.25,0) 3(-1.25,-0.95) 4(1.25,-0.95) 5(1.25,0.95)
  silkscreen extent -1.85,-1.45 0.3,1.5, body extent -1.4,-1.45 1.4,1.45, height 1.2
SOT230P700X180-4N [mm]
  rect 1.9x0.9 smd: 1(-3.05,2.3) 2(-3.05,0) 3(-3.05,-2.3)
  rect 1.9x3.2 smd: 4(3.05,0)
  silkscreen extent -4,-3.25 1.75,3.25, body extent -3.5,-3.25 3.5,3.25, height 1.8
THRMC1608X95N [mm]
  rect 1x1 smd: 1(-0.75,0) 2(0.75,0)
  silkscreen extent 0,-0.3 0,0.3, body extent -0.8,-0.4 0.8,0.4, height 0.95
UCC27282DRCR [mm]
  rect 0.6x0.24 smd: 1(-1.4,1) 2(-1.4,0.5) 3(-1.4,0) 4(-1.4,-0.5) 5(-1.4,-1) 6(1.4,-1) 7(1.4,-0.5) 8(1.4,0) 9(1.4,0.5) 10(1.4,1)
  rect 1.65x2.4 smd: 11(0,0)
  rect 0.25x0.5 smd: 12(-0.25,-1.45) 13(0.25,-1.45) 14(0.25,1.45) 15(-0.25,1.45)
  silkscreen extent -1.8,1.73 -1.7,1.82, body extent -1.5,-1.5 1.5,1.5, height 1.1

## Part data
C100 C101 C102 C103 C104 C105 C106 C107 C108 C109 C110 C111 C112 C113 C200 C201 C202 C203 C204 C205 C300 C301 C302 C303 C304 C305 C306 C307 C401 C402 C404 C405 C406 C500 C501 C502 C503 C504 C505 C506 C507 C508 C509 C510 C511 C512 C513 C514 C515 C700 C701 C702 C708 C709 C710: library part C0603, "Capacitor", Mouser Part Number=77-VJ0603Y104JXJAC, Mouser Price/Stock=https://www.mouser.com/Search/Refine.aspx?Keyword=77-VJ0603Y104JXJAC
C600 C602 C604 C606 C610 C611 C612 C613: library part C1210, "Capacitor", Mouser Part Number=187-CL32B106KMVNNWE, Arrow Price/Stock=https://www.arrow.com/en/products/cl32b106kmvnnwe/samsung-electro-mechanics, Mouser Price/Stock=https://www.mouser.co.uk/ProductDetail/Samsung-Electro-Mechanics/CL32B106KMVNNWE?qs=xZ%2FP%252Ba9zWqaEMBbSgKy8gQ%3D%3D
C608 C609: library part MAL215097701E3, "ELKO 10x10x10", Manufacturer_Name=Vishay, Mouser Part Number=594-MAL215097701E3, Datasheet Link=https://www.vishay.com/docs/28395/150crz.pdf, Height=10.5mm, Manufacturer_Part_Number=MAL215097701E3, Mouser Price/Stock=https://www.mouser.co.uk/ProductDetail/Vishay-BC-Components/MAL215097701E3?qs=bKenfurwlsnF8zBng3kToA%3D%3D
C704: library part GRM1885C1H201JA01D, "Capacitor", Manufacturer_Name="Murata Electronics", Mouser Part Number=81-GRM39C201J50, Datasheet Link=http://www.murata.com/~/media/webrenewal/support/library/catalog/products/capacitor/mlcc/c02e.pdf, Height=0.9mm, Manufacturer_Part_Number=GRM1885C1H201JA01D, Mouser Price/Stock=https://www.mouser.com/Search/Refine.aspx?Keyword=81-GRM39C201J50
D200 D201 D202 D203: "TVS Diode (Uni-directional)", Height=0.6mm
D400: library part BAT54S, "Schottky Diode", Manufacturer_Name=Rectron, Mouser Part Number=583-BAT54S, Arrow Part Number=BAT54S, Arrow Price/Stock=https://www.arrow.com/en/products/bat54s/rectron, Datasheet Link=https://www.rectron.com/data_sheets/bat54s.pdf, Height=1.1mm, Manufacturer_Part_Number=BAT54S, Mouser Price/Stock=https://www.mouser.co.uk/ProductDetail/Rectron/BAT54S?qs=7pEAo90IqNGRiqD7TkybWA%3D%3D
D700: library part STPS1L30AFN, "Schottky Diode", Manufacturer_Name=STMicroelectronics, Mouser Part Number=511-STPS1L30AFN, Arrow Part Number=STPS1L30AFN, Arrow Price/Stock=https://www.arrow.com/en/products/stps1l30afn/stmicroelectronics?region=nac, Datasheet Link=https://4donline.ihs.com/images/VipMasterIC/IC/SGST/SGST-S-A0009026271/SGST-S-A0009026271-1.pdf?hkey=6D3A4C79FDBF58556ACFDE234799DDF0, Height=1.1mm, Manufacturer_Part_Number=STPS1L30AFN, Mouser Price/Stock=https://www.mouser.co.uk/ProductDetail/STMicroelectronics/STPS1L30AFN?qs=Cb2nCFKsA8pl%252BsoFM6iGfw%3D%3D
IC200 IC300 IC301: library part 74LVC3G17DP,125, "3x Schmitt trigger", Manufacturer_Name=Nexperia, Mouser Part Number=771-LVC3G17DP125, Arrow Part Number=74LVC3G17DP,125, Arrow Price/Stock=https://www.arrow.com/en/products/74lvc3g17dp125/nexperia, Datasheet Link=https://assets.nexperia.com/documents/data-sheet/74LVC3G17.pdf, Height=1.1mm, Manufacturer_Part_Number=74LVC3G17DP,125, Mouser Price/Stock=https://www.mouser.co.uk/ProductDetail/Nexperia/74LVC3G17DP125?qs=me8TqzrmIYUUngWcw0uHGA%3D%3D
IC201: "3bit bin to dec noninverting", Manufacturer_Name="Texas Instruments", Manufacturer_Part_Number=SN74HCS238QBQBRQ1, Mouser Part Number=595-N74HCS238QBQBRQ1, Datasheet Link=https://www.ti.com/lit/gpn/SN74HCS238-Q1, Height=0.8mm
IC202: library part 74AUP2G132GF,115, "Dual triple input NAND", Manufacturer_Name=Nexperia, Mouser Part Number=771-74AUP2G132GF115, Datasheet Link=https://assets.nexperia.com/documents/data-sheet/74AUP2G132.pdf, Manufacturer_Part_Number=74AUP2G132GF,115, Mouser Price/Stock=https://www.mouser.co.uk/ProductDetail/Nexperia/74AUP2G132GF115?qs=jquClx72t9AzfoBXotQVdg%3D%3D
IC400 IC401: "Current shunt amp", Arrow Part Number=INA240A4PWR, Manufacturer_Name="Texas Instruments", Mouser Part Number=595-INA240A4PWR, Arrow Price/Stock=https://www.arrow.com/en/products/ina240a4pwr/texas-instruments?region=nac, Datasheet Link=http://www.ti.com/lit/ds/symlink/ina240.pdf, Height=1.2mm, Manufacturer_Part_Number=INA240A4PWR, Mouser Price/Stock=https://www.mouser.co.uk/ProductDetail/Texas-Instruments/INA240A4PWR?qs=aVyJF2WnouQ31PAZ9p0r8w%3D%3D
IC402: "Le' Megaslow 358", Manufacturer_Name=STMicroelectronics, Mouser Part Number=511-LM358QT, Arrow Part Number=LM358QT, Arrow Price/Stock=https://www.arrow.com/en/products/lm358qt/stmicroelectronics?region=nac, Datasheet Link=https://componentsearchengine.com/Datasheets/1/LM358QT.pdf, Height=0.6mm, Manufacturer_Part_Number=LM358QT, Mouser Price/Stock=https://www.mouser.co.uk/ProductDetail/STMicroelectronics/LM358QT?qs=GkDVaEP5dcs4xwTXUtddog%3D%3D
IC500 IC501 IC502 IC503: "Halfbridge driver IC", Arrow Part Number=UCC27282DRCR, Manufacturer_Name="Texas Instruments", Mouser Part Number=595-UCC27282DRCR, Arrow Price/Stock=https://www.arrow.com/en/products/ucc27282drcr/texas-instruments?region=nac, Datasheet Link=https://www.ti.com/lit/ds/symlink/ucc27282.pdf?ts=1615361050656&ref_url=https%253A%252F%252Fwww.ti.com%252Fstore%252Fti%252Fen%252Fp%252Fproduct%252F%253Fp%253DUCC27282DRCR, Height=1mm, Manufacturer_Part_Number=UCC27282QDRCTQ1, Mouser Price/Stock=https://www.mouser.co.uk/ProductDetail/Texas-Instruments/UCC27282DRCR?qs=PqoDHHvF64%252BEqc2WJXKXkQ%3D%3D
IC700: library part AP2114H-3.3TRG1, "3V3 LDO", Manufacturer_Name="Diodes Inc.", Mouser Part Number=621-AP2114H-3.3TRG1, Arrow Part Number=AP2114H-3.3TRG1, Arrow Price/Stock=https://www.arrow.com/en/products/ap2114h-3.3trg1/diodes-incorporated, Datasheet Link=http://uk.rs-online.com/web/p/products/8283528, Height=1.8mm, Manufacturer_Part_Number=AP2114H-3.3TRG1, Mouser Price/Stock=https://www.mouser.co.uk/ProductDetail/Diodes-Incorporated/AP2114H-33TRG1?qs=x6A8l6qLYDDSG%2FfwzcsOhw%3D%3D
"IC 100": library part "TMC4671-LA IC", "FOC Motion Controller", Manufacturer_Name=Trinamic, Manufacturer_Part_Number=TMC4671-LA
J10 J201: "10Pin DF13 Connector", Arrow Part Number=DF13A-10P-1.25H(21), Manufacturer_Name=Hirose, Mouser Part Number=798-DF13A10P125H21, Arrow Price/Stock=https://www.arrow.com/en/products/df13a-10p-1.25h-21/hirose-electric, Datasheet Link=https://datasheet.datasheetarchive.com/originals/dk/DKDS-30/590349.pdf, Height=3.75mm, Manufacturer_Part_Number=DF13A-10P-1.25H(21), Mouser Price/Stock=https://www.mouser.co.uk/ProductDetail/Hirose-Connector/DF13A-10P-125H21?qs=XQjbzJWzFPV7pEVOeMnY%2FQ%3D%3D
J200 J204 J300 J301: library part DF13A-5P-1.25H_21_, "Connector", Manufacturer_Name=Hirose, Manufacturer_Part_Number=DF13A-5P-1.25H(21), Mouser Part Number=798-DF13A5P125H21, Datasheet Link=https://componentsearchengine.com/Datasheets/1/DF13A-5P-1.25H(21).pdf, Height=3.75mm, Mouser Price/Stock=https://www.mouser.co.uk/ProductDetail/Hirose-Connector/DF13A-5P-125H21?qs=XQjbzJWzFPWvJsE2o%252B4Q8Q%3D%3D
J202: library part DF13A-6P-1.25H_21_, "6 Pin DF13 Connector", Arrow Part Number=DF13A-6P-1.25H(21), Manufacturer_Name=Hirose, Mouser Part Number=798-DF13A6P125H21, Arrow Price/Stock=https://www.arrow.com/en/products/df13a-6p-1.25h-21/hirose-electric, Datasheet Link=https://www.hirose.com/product/download/?distributor=digikey&type=2d&lang=en&num=DF13A-6P-1.25H(21), Height=3.75mm, Manufacturer_Part_Number=DF13A-6P-1.25H(21), Mouser Price/Stock=https://www.mouser.co.uk/ProductDetail/Hirose-Connector/DF13A-6P-125H21?qs=XQjbzJWzFPXnreVi%252BPl0Lg%3D%3D
J205 J206 J207 J208: library part Pin
L100: library part BLM18KG300TH1D, "Ferrite Bead", Manufacturer_Name="Murata Electronics", Mouser Part Number=81-BLM18KG300TH1D, Arrow Part Number=BLM18KG300TH1D, Arrow Price/Stock=https://www.arrow.com/en/products/blm18kg300th1d/murata-manufacturing, Datasheet Link=https://www.murata.com/en-us/products/productdetail?partno=BLM18KG300TH1%23, Height=0.75mm, Manufacturer_Part_Number=BLM18KG300TH1D, Mouser Price/Stock=https://www.mouser.com/Search/Refine.aspx?Keyword=81-BLM18KG300TH1D
L700: library part 74438357100, "Inductor", Manufacturer_Name="Wurth Elektronik", Mouser Part Number=710-74438357100, Datasheet Link=https://katalog.we-online.com/pbs/datasheet/74438357100.pdf, Height=4mm, Manufacturer_Part_Number=74438357100, Mouser Price/Stock=https://www.mouser.co.uk/ProductDetail/Wurth-Elektronik/74438357100?qs=AQlKX63v8RsOZwIYXNHv7w%3D%3D
LED_Amber400: library part ASMT-RA45-AP932, "LED", Manufacturer_Name="Avago Technologies", Mouser Part Number=630-ASMT-RA45-AP932, Datasheet Link=https://docs.broadcom.com/docs/AV02-0378EN, Height=0.55mm, Manufacturer_Part_Number=ASMT-RA45-AP932, Mouser Price/Stock=https://www.mouser.co.uk/ProductDetail/Broadcom-Avago/ASMT-RA45-AP932?qs=7zQgkplsu%2FO5gZneoB42ug%3D%3D
LED_Blue400: library part LB_Q39G-L2OO-35-1, "LED", Arrow Part Number="LB Q39G-L2OO-35-1", Manufacturer_Name=OSRAM, Mouser Part Number=720-LBQ39GL2N2351, Arrow Price/Stock=https://www.arrow.com/en/products/lbq39g-l2oo-35-1/osram-opto-semiconductors, Datasheet Link="http://www.mouser.com/ds/2/311/LB Q39G - CHIPLED 0603-553388.pdf", Height=0.4mm, Manufacturer_Part_Number="LB Q39G-L2OO-35-1", Mouser Price/Stock=https://www.mouser.co.uk/ProductDetail/OSRAM-Opto-Semiconductors/LB-Q39G-L2OO-35-1?qs=74fRo9GAWsxvZBH6a5xY%252BA%3D%3D
LED_Green400: library part LG_Q396-PS-35, "LED Green", Arrow Part Number="LG Q396-PS-35", Manufacturer_Name=OSRAM, Mouser Part Number=720-LGQ396A3964, Arrow Price/Stock=https://www.arrow.com/en/products/lgq396-ps-35/osram-opto-semiconductors, Datasheet Link=https://mouser.componentsearchengine.com/Datasheets/2/LG%20Q396-PS-35.pdf, Height=0.4mm, Manufacturer_Part_Number="LG Q396-PS-35", Mouser Price/Stock=https://www.mouser.co.uk/ProductDetail/OSRAM-Opto-Semiconductors/LG-Q396-PS-35?qs=xC%252BE9h5iuX5%252BCocujXxOpw%3D%3D
Q100: "MOSFET (N-Channel)", Manufacturer_Name=Nexperia, Mouser Part Number=771-BUK9M35-80EX, Arrow Part Number=BUK9M35-80EX, Arrow Price/Stock=https://www.arrow.com/en/products/buk9m35-80ex/nexperia, Datasheet Link=https://assets.nexperia.com/documents/data-sheet/BUK9M35-80E.pdf, Manufacturer_Part_Number=BUK9M35-80EX, Mouser Price/Stock=https://www.mouser.com/Search/Refine.aspx?Keyword=771-BUK9M35-80EX
Q101: "Transistor BJT NPN", Manufacturer_Name=Nexperia, Mouser Part Number=771-BC847A235, Arrow Part Number=BC847A,235, Arrow Price/Stock=https://www.arrow.com/en/products/bc847a235/nexperia, Datasheet Link=http://assets.nexperia.com/documents/data-sheet/BC847_SER.pdf, Height=1.1mm, Manufacturer_Part_Number=BC847A,235, Mouser Price/Stock=https://www.mouser.co.uk/ProductDetail/Nexperia/BC847A235?qs=me8TqzrmIYWeD%252BqPzufrRA%3D%3D
Q600 Q602 Q604 Q606 Q608 Q610 Q612 Q614: library part SIR680DP-T1-RE3, "MOSFET (N-Channel)", Manufacturer_Name=Vishay, Mouser Part Number=78-SIR680DP-T1-RE3, Arrow Part Number=SIR680DP-T1-RE3, Arrow Price/Stock=https://www.arrow.com/en/products/sir680dp-t1-re3/vishay, Datasheet Link=https://www.vishay.com/docs/75267/sir680dp.pdf, Height=1.12mm, Manufacturer_Part_Number=SIR680DP-T1-RE3, Mouser Price/Stock=https://www.mouser.co.uk/ProductDetail/Vishay-Siliconix/SIR680DP-T1-RE3?qs=Mv7BduZupUi1ZFscSbHz5g%3D%3D
R100 R101 R102 R103 R104 R200 R201 R202 R203 R204 R205 R300 R301 R302 R303 R304 R305 R306 R307 R308 R309 R310 R311 R401 R403 R404 R405 R406 R407 R408 R409 R410 R701 R702: library part R0603, "Resistor"
R206 R207 R208 R209 R210 R211 R212 R213 R214 R215 R216 R217 R218 R219 R220 R221: library part R0402, "Resistor", Height=0.4mm
R700: library part RC0603FR-071ML, "Resistor", Manufacturer_Name="YAGEO (PHYCOMP)", Mouser Part Number=603-RC0603FR-071ML, Arrow Part Number=RC0603FR-071ML, Arrow Price/Stock=https://www.arrow.com/en/products/rc0603fr-071ml/yageo, Datasheet Link=https://www.yageo.com/upload/media/product/productsearch/datasheet/rchip/PYu-RC_Group_51_RoHS_L_11.pdf, Height=0.55mm, Manufacturer_Part_Number=RC0603FR-071ML, Mouser Price/Stock=https://www.mouser.co.uk/ProductDetail/Yageo/RC0603FR-071ML/?qs=VU8sRB4EgwDPceeQKB324w%3D%3D
RS600 RS601: library part FC4L90R025FER, "Resistor", Manufacturer_Name=Ohmite, Mouser Part Number=588-FC4L90R025FER, Datasheet Link=https://componentsearchengine.com/Datasheets/1/FC4L90R025FER.pdf, Height=0.8mm, Manufacturer_Part_Number=FC4L90R025FER, Mouser Price/Stock=https://www.mouser.co.uk/ProductDetail/Ohmite/FC4L90R025FER?qs=lc2O%252BfHJPVauiFLZwCqH8Q%3D%3D
RT100: library part NCP18XH103F03RB, "Thermistor", Manufacturer_Name="Murata Electronics", Mouser Part Number=81-NCP18XH103F03RB, Arrow Part Number=NCP18XH103F03RB, Arrow Price/Stock=https://www.arrow.com/en/products/ncp18xh103f03rb/murata-manufacturing?region=europe, Datasheet Link=https://componentsearchengine.com/Datasheets/2/NCP18XH103F03RB.pdf, Height=0.95mm, Manufacturer_Part_Number=NCP18XH103F03RB, Mouser Price/Stock=https://www.mouser.co.uk/ProductDetail/Murata-Electronics/NCP18XH103F03RB?qs=k3rQb2PKXqkF9YvF09qsvw%3D%3D
S100: library part PTS647SM50SMTR2LFS, "Switch", Manufacturer_Name="C & K COMPONENTS", Mouser Part Number=611-PTS647SM50SMTR2L, Arrow Part Number=PTS647SM50SMTR2LFS, Arrow Price/Stock=https://www.arrow.com/en/products/pts-647-sm50-smtr2-lfs/ck?region=nac, Datasheet Link=https://www.ckswitches.com/media/2567/pts647.pdf, Height=5.25mm, Manufacturer_Part_Number=PTS647SM50SMTR2LFS, Mouser Price/Stock=https://www.mouser.co.uk/ProductDetail/CK/PTS647SM50SMTR2LFS?qs=PqoDHHvF64%252BjK4ZB7f42kw%3D%3D
S700: "Switch", Arrow Part Number=LMR62014XMF/NOPB, Manufacturer_Name="Texas Instruments", Mouser Part Number=926-LMR62014XMF/NOPB, Arrow Price/Stock=https://www.arrow.com/en/products/lmr62014xmfnopb/texas-instruments, Datasheet Link=http://www.ti.com/lit/gpn/lmr62014, Height=1.45mm, Manufacturer_Part_Number=LMR62014XMF/NOPB, Mouser Price/Stock=https://www.mouser.co.uk/ProductDetail/Texas-Instruments/LMR62014XMF-NOPB?qs=cN01o9PeIQtA177Vn0GXdQ%3D%3D
SB200 SB201 SB202 SB203 SB204 SB205: Manufacturer=YAGEO, Manufacturer_Part_Number=RC0603JR-070RL, Package=SB0603, ComponentLink1Description=Datasheet, ComponentLink1URL=http://tunmcdsvn.tun.st.com/Component_Datasheet_Library/Trunk/Resistors/Yageo_Resistor_RC0603-series, ECCN_EU=n/a, ECCN_US=n/a, Internal_Part_Number=MCD-00071, Part_Type=Mechanical, Provided_By=SUBCO, Status=Released
XTL100: library part FOX924B-25, "25Mhz Oscillator", Manufacturer_Name=FOX, Manufacturer_Part_Number=FOX924B-25

## Free pads (board coordinates)
  round 6 hole 3.4: 2(3.81,3.81) 2(3.81,52.07) 2(49.53,3.81) 2(49.53,52.07) 2(95.25,3.81) 2(95.25,52.07)

## Via types
v1: diameter 0.8, hole 0.45, Top Layer to Bottom Layer, tented both sides, 308 vias
v2: diameter 0.6, hole 0.3, Top Layer to Bottom Layer, tented both sides, 176 vias

## Nets (pads, with @x,y where several pads share a name; then routed paths per layer and width w, separated by ;. In a path a pad name is that pad's centre, name@x,y a point inside that pad or via, vN(x,y) a via of type N, cw(c..) or ccw(c..) an arc to the next point about the centre after c; other vN are vias at no path point)
3V3: "IC 100.2" "IC 100.13" "IC 100.43" "IC 100.52" "IC 100.55" "IC 100.61" "IC 100.72" C101.2 C102.2 C103.2 C104.2 C105.2 C108.2 C109.1 C200.2 C204.1 C205.1 C300.2 C304.2 C702.1 D200.5 D201.5 D202.5 D203.5 IC200.8 IC201.6 IC201.16 IC202.8 IC300.8 IC301.8 IC700.2 IC700.4 J202.1 J204.5 J205.1 L100.1 R103.2 R405.1 RT100.1 | length 57.8
  Top Layer w0.15: IC202.8@18.913,33.786 18.913,32.457 C205.1@18.985,32.385
  Top Layer w0.2: v2(17.907,21.655) 18.182,21.93 19.311,21.93 ; v2(17.907,26.989) 18.007,26.989 18.666,26.33 19.311,26.33 ; 21.511,27.33 21.511,29.32 C105.2@21.59,29.399 21.69,29.399 22.39,30.099 v2(22.479,30.099) ; 25.911,27.33 25.911,27.816 26.416,28.321 27.051,28.321 27.305,28.575 C104.2@27.305,29.399 ; v2(27.813,28.448) 28.311,27.95 28.311,27.33 ; 29.711,23.13 33.42,23.13 34.352,22.198 34.352,21.998 35.141,21.209 v2(35.179,21.209) ; 29.711,26.73 30.921,26.73 31.496,27.305 C109.1@31.496,28.702
  Top Layer w0.24: v2(16.383,39.878) 16.48,39.878 16.62,40.018 IC201.6@17.515,40.018 ; IC201.16@18.915,42.418 C204.1@18.915,43.815
  Top Layer w0.3: v1(11.811,24.257) R103.2@11.811,25.489 ; v2(17.907,43.815) 18.915,43.815 C204.1@18.985,43.815 ; v2(18.288,11.557) 18.3,11.569 RT100.1@19.431,11.569 ; v2(18.923,31.242) 18.954,31.273 18.954,32.354 C205.1@18.985,32.385 ; v2(23.368,12.192) 23.425,12.135 23.667,12.135 24.236,11.566 24.336,11.566 24.576,11.326 C300.2@24.576,11.226 24.744,11.394 IC300.8@25.965,11.394 ; C104.2@27.305,29.399 27.336,29.368 28.29,29.368 v2(28.321,29.337) ; IC301.8@28.772,44.917 29.993,44.917 C304.2@30.161,45.085 30.161,44.985 30.401,44.745 30.501,44.745 31.05,44.196 v1(32.639,44.196) ; C108.2@31.496,29.972 v1(31.496,31.242) ; v1(32.639,42.164) 34.29,43.815 34.29,52.07 34.671,52.451 R405.1@35.611,52.451 ; v1(33.02,36.322) L100.1@34.083,36.322 ; v1(33.909,12.115) 35.498,12.115 36.047,11.566 36.147,11.566 36.387,11.326 C200.2@36.387,11.226 36.555,11.394 IC200.8@37.776,11.394
  Top Layer w0.4: C109.1@31.496,28.702 C108.2@31.496,29.972
  other v1: 12.7,45.212 13.716,45.212 14.732,45.212 15.748,45.212 12.065,45.974 16.383,45.974 12.065,46.99 16.383,46.99 12.065,48.006 16.383,48.006
  other v2: 18.352,5.789 18.352,6.678 5.518,10.822 6.407,10.822 13.94,11.557 11.176,15.27 12.954,37.368 12.954,42.321
+2,5V_ref_aenc: "IC 100.26" "IC 100.28" "IC 100.30" C406.2 R409.1 R410.2 | length 28
  Top Layer w0.2: C406.2@16.5,20.546 C406.2@16.51,20.536 ; v2(24.003,16.51) 24.003,16.618 24.311,16.926 24.311,20.93 ; 25.111,20.93 25.111,16.827 25.161,16.777 25.161,16.587 v2(25.238,16.51) ; 25.911,20.93 25.911,17.142 v2(26.543,16.51)
  Top Layer w0.3: C406.2@16.448,20.32 16.448,19.038 R409.1@16.539,18.947 16.548,18.938 R410.2@16.548,17.399 16.51,17.361 v2(16.51,16.256)
  Bottom Layer w0.2: v2(16.51,16.256) 23.686,16.256 23.94,16.51 v2(24.003,16.51) v2(25.238,16.51) v2(26.543,16.51)
+2,5V_ref_camp: "IC 100.17" "IC 100.19" IC400.6 IC400.7 IC401.6 IC401.7 IC402.1 IC402.2 | length 153.2
  Top Layer w0.2: v2(20.574,17.78) 20.047,18.307 20.047,18.904 20.711,19.568 20.711,20.93 ; v2@20.701,18.034 21.511,18.844 21.511,20.93
  Top Layer w0.3: IC402.1@39.847,33.313 IC402.1@40.047,33.313 ; IC402.2@39.847,33.813 40.047,33.813 IC402.1@40.047,33.313 ; v1(43.434,16.637) 45.847,19.05 45.847,32.336 44.87,33.313 ; v1(45.847,37.592) 45.847,34.29 44.87,33.313 ; IC402.1@40.047,33.313 44.87,33.313
  Top Layer w0.4: v1(31.242,16.637) v1(43.434,16.637)
  Mid Layer 2 w0.4: v1(54.356,42.545) 54.356,45.466 54.737,45.847 77.089,45.847 79.375,48.133 79.375,50.8 81.227,52.652 81.735,52.652 v1(81.788,52.705) ; v1(55.88,8.89) 56.388,9.398 73.914,9.398 74.676,8.636 74.676,5.842 75.565,4.953 79.629,4.953 80.772,3.81 v1(81.788,3.81)
  Bottom Layer w0.4: v2(20.574,17.78) 20.577,17.78 21.212,18.415 28.448,18.415 30.226,16.637 v1(31.242,16.637) ; v1(43.434,16.637) 44.958,16.637 46.482,15.113 46.482,12.573 50.165,8.89 v1(55.88,8.89) ; v1(45.847,37.592) 45.847,39.751 46.863,40.767 50.165,40.767 51.943,42.545 v1(54.356,42.545)
+5: "IC 100.23" C106.2 C107.1 C401.2 C404.2 C700.1 C701.1 C708.1 D400.2 IC400.5 IC401.5 IC402.8 IC700.3 J10.10 J200.5 J201.1 J300.5 J301.5 L700.1 R200.2 R201.2 R202.2 R300.2 R301.2 R302.2 R306.2 R307.2 R308.2 R401.2 R404.1 R409.2 R700.2 S700.5 | length 113.9
  Top Layer w0.2: v1(22.098,16.891) 22.213,17.006 22.213,17.251 23.111,18.149 23.111,20.93
  Top Layer w0.3: v1@21.844,46.405 21.863,46.424 23.095,46.424 R308.2@23.114,46.444 ; v1(22.479,9.905) 22.517,9.867 R300.2@24.003,9.867 ; R307.2@26.183,46.429 26.196,46.416 26.196,45.77 26.626,45.339 v2(26.67,45.339) ; v2(28.067,10.972) 28.111,10.972 28.541,10.541 28.541,9.895 R301.2@28.554,9.882 ; R306.2@30.734,46.444 31.966,46.444 v1(32.004,46.406) ; R302.2@31.623,9.867 31.642,9.887 32.874,9.887 v1(32.893,9.906) ; v1(34.544,9.905) 34.582,9.867 R200.2@35.814,9.867 ; v1(37.208,32.312) 37.208,32.974 37.547,33.313 IC402.8@37.747,33.313 ; v2(39.878,10.972) 39.922,10.972 40.352,10.541 40.352,9.895 R201.2@40.365,9.882 ; R202.2@43.434,9.867 43.453,9.887 44.685,9.887 v1(44.704,9.906)
  Top Layer w0.4: v2(13.97,18.923) 14.915,18.923 R409.2@14.939,18.947 ; C106.2@20.828,15.94 C107.1@22.098,15.94 v1(22.098,16.891) ; R404.1@40.462,52.451 v1(41.783,52.451) ; D400.2@40.955,40.302 41.035,40.222 41.035,39.483 v1(41.529,38.989) ; R401.2@42.964,37.465 v1(44.069,37.465) ; v1(81.788,4.953) 81.896,4.953 82.064,4.785 IC400.5@83.422,4.785 84.496,4.785 84.963,4.318 84.963,2.094 85.37,1.687 85.47,1.687 85.66,1.497 C401.2@85.66,1.397 ; v1@82.064,53.68 IC401.5@83.422,53.68 85.049,53.68 85.546,54.177 85.546,54.877 C404.2@85.66,54.991
  Mid Layer 2 w0.4: v2(13.97,18.923) 16.764,18.923 19.558,16.129 21.336,16.129 v1(22.098,16.891) v1@22.098,16.783 ; v1(47.625,46.736) 76.835,46.736 78.613,48.514 78.613,51.054 81.33,53.771 81.711,53.771 v1(81.788,53.848) ; 56.007,10.033 74.168,10.033 75.311,8.89 75.311,6.223 75.946,5.588 80.01,5.588 80.645,4.953 v1(81.788,4.953)
  other v1: 8.255,45.72 9.525,45.72 21.844,46.355 43.561,46.736 44.577,46.736 45.593,46.736 46.609,46.736 8.255,46.99 9.525,46.99 8.255,48.26 9.525,48.26 8.255,49.53 9.525,49.53
  other v2: 30.326,5.441 42.111,5.466 30.326,6.33 42.111,6.355 5.588,44.233 6.35,44.233 24.411,49.473 24.411,50.362
+13V5: C500.2 C501.2 C504.2 C505.2 C508.2 C509.2 C512.2 C513.2 C704.1 C709.1 C710.1 D700.1 IC500.1 IC501.1 IC502.1 IC503.1 R701.1 | length 35
  Bottom Layer w1: v1(49.149,38.481) v1(50.165,38.481) v1(51.181,38.481) v1(52.197,38.481) v1(53.213,38.481) 55.245,36.449 55.245,34.104 v1(54.353,33.212) 54.353,32.007 v1(54.356,32.004) 54.356,31.939 55.245,31.05 55.245,27.119 v1(54.353,26.227) v1(54.353,24.957) 55.245,24.065 55.245,20.134 v1(54.353,19.242) v1(54.353,17.972) 55.245,17.08 55.245,13.149 v1(54.353,12.257) v1(54.353,10.987)
ADC_I0_P: "IC 100.16" IC400.8 | length 79.2
  Top Layer w0.2: v2(19.304,18.796) 20.311,19.803 20.311,20.93
  Top Layer w0.4: v1(81.788,2.667) 81.896,2.667 82.064,2.835 IC400.8@83.422,2.835
  Mid Layer 2 w0.4: v1(55.88,7.62) 57.023,8.763 73.787,8.763 74.041,8.509 74.041,5.461 75.184,4.318 79.375,4.318 81.026,2.667 v1(81.788,2.667)
  Bottom Layer w0.4: v2(19.304,18.796) 21.082,20.574 31.369,20.574 32.639,19.304 35.052,19.304 38.862,15.494 45.212,15.494 45.72,14.986 45.72,12.319 50.419,7.62 v1(55.88,7.62)
ADC_I1_P: "IC 100.18" IC401.8 | length 94.4
  Top Layer w0.2: v2(20.574,18.669) 21.111,19.206 21.111,20.93
  Top Layer w0.4: v1(31.242,17.907) 43.688,17.907 44.323,18.542 v1(44.323,32.258) ; v1(81.788,51.562) 81.896,51.562 82.064,51.73 IC401.8@83.422,51.73
  Mid Layer 2 w0.4: v1(55.499,43.688) 55.499,44.958 55.753,45.212 77.343,45.212 80.01,47.879 80.01,50.419 81.153,51.562 v1(81.788,51.562) ; 57.912,44.831 57.965,44.831
  Bottom Layer w0.4: v2(20.574,18.669) 20.955,19.05 28.956,19.05 30.099,17.907 v1(31.242,17.907) ; v1(44.323,32.258) 45.085,33.02 45.085,40.005 46.736,41.656 49.911,41.656 51.943,43.688 v1(55.499,43.688)
ADC_VM: "IC 100.20" IC402.6 IC402.7 | length 34.1
  Top Layer w0.2: 21.911,20.93 21.911,19.98 22.098,19.793 v2(22.098,19.685)
  Top Layer w0.3: v1(31.242,19.177) 36.957,19.177 38.354,20.574 38.354,28.448 36.531,30.271 36.531,33.483 36.861,33.813 IC402.7@37.547,33.813 ; IC402.7@37.747,33.813 IC402.7@37.547,33.813 ; IC402.6@37.747,34.313 37.547,34.313 IC402.7@37.547,33.813
  Bottom Layer w0.4: v2(22.098,19.685) 29.337,19.685 29.845,19.177 v1(31.242,19.177)
AENC.UX_P: "IC 100.25" D203.3 R217.2 | length 23.2
  Top Layer w0.2: v2(23.241,14.351) 23.241,16.637 23.911,17.307 23.911,20.93
  Top Layer w0.3: R217.2@8.755,12.065 9.398,12.065 9.718,11.745 11.872,11.745 11.976,11.849 11.976,12.52 D203.3@12.126,12.67 12.126,12.931 12.276,13.081 13.081,13.081 13.97,13.97 v2(16.51,13.97)
  Bottom Layer w0.2: v2(16.51,13.97) 17.272,13.97 17.78,14.478 22.733,14.478 22.86,14.351 v2(23.241,14.351)
AENC.VN_P: "IC 100.27" D203.1 R218.2 | length 25.2
  Top Layer w0.2: 24.711,20.93 24.711,15.548 v2(25.654,14.605)
  Top Layer w0.3: R218.2@8.755,13.335 9.561,13.335 9.801,13.095 10.076,13.095 D203.1@10.226,12.945 ; D203.1@10.226,12.67 10.376,12.82 10.376,13.413 10.552,13.589 12.827,13.589 13.97,14.732 v2(16.51,14.732)
  Bottom Layer w0.2: v2(16.51,14.732) 17.272,14.732 17.526,14.986 25.273,14.986 v2(25.654,14.605)
AENC.WY_P: "IC 100.29" D203.6 R219.2 | length 24.8
  Top Layer w0.2: 25.511,20.93 25.511,17.018 25.908,16.621 25.908,16.256 26.162,16.002 v2(26.162,15.494)
  Top Layer w0.3: R219.2@8.755,14.605 9.398,14.605 9.638,14.845 10.076,14.845 10.226,14.995 D203.6@10.226,15.27 10.376,15.12 10.376,14.527 10.552,14.351 12.7,14.351 13.843,15.494 v2(16.51,15.494)
  Bottom Layer w0.2: v2(16.51,15.494) v2(26.162,15.494)
AUX_CS: D200.3 IC202.6 IC202.7 R206.2 | length 27.7
  Top Layer w0.15: v2(17.907,29.083) 17.907,29.089 18.213,29.395 18.213,32.992 ; IC202.6@18.213,33.786 18.213,32.992 ; IC202.7@18.563,33.786 18.563,33.342 18.213,32.992
  Top Layer w0.3: D200.3@16.54,12.642 16.825,12.357 17.289,12.357 17.465,12.181 17.465,10.099 17.145,9.779 R206.2@17.145,9.144
  Bottom Layer w0.2: v2(16.54,12.507) 16.54,13.051 15.875,13.716 15.875,20.193 16.891,21.209 16.891,28.067 v2(17.907,29.083)
BRAKE: "IC 100.31" R101.1 | length 41
  Top Layer w0.2: 26.311,20.93 26.311,20.044 26.543,19.812 v2(26.543,17.653)
  Top Layer w0.4: v1(47.371,7.62) 51.562,7.62 52.705,6.477 56.261,6.477 58.012,8.228 58.012,8.825 R101.1@58.175,8.988
  Bottom Layer w0.4: v2(26.543,17.653) 28.702,15.494 33.782,15.494 41.656,7.62 v1(47.371,7.62)
BUS_1: J10.9 J201.2 R210.2 | length 3.2
  Top Layer w0.4: v2(6.35,42.983) 6.379,42.954 9.505,42.954 R210.2@9.533,42.926
  other v2: 5.588,42.983
BUS_2: J10.8 J201.3 R211.2 | length 3.2
  Top Layer w0.4: v2(6.35,41.733) 6.389,41.694 9.495,41.694 R211.2@9.533,41.656
  other v2: 5.588,41.733
BUS_3: J10.7 J201.4 R212.2 | length 3.2
  Top Layer w0.4: v2(6.35,40.483) 6.399,40.434 9.485,40.434 R212.2@9.533,40.386
  other v2: 5.588,40.483
BUS_4: J10.6 J201.5 R213.2 | length 3.2
  Top Layer w0.4: v2(6.35,39.233) 6.409,39.174 9.475,39.174 R213.2@9.533,39.116
  other v2: 5.588,39.233
BUS_5: J10.5 J201.6 R214.2 | length 3.2
  Top Layer w0.4: v2(6.35,37.983) 6.355,37.978 9.528,37.978 R214.2@9.533,37.973
  other v2: 5.588,37.983
BUS_6: J10.3 J201.8 R215.2 | length 3.7
  Top Layer w0.4: v2(6.35,35.483) 7.416,35.483 8.636,36.703 R215.2@9.533,36.703
  other v2: 5.588,35.483
BUS_7: J10.2 J201.9 R216.2 | length 3.7
  Top Layer w0.4: v2(6.35,34.233) 7.69,34.233 8.89,35.433 R216.2@9.533,35.433
  other v2: 5.588,34.233